# Altium PCB Control_Board_Model_C_Rigid_Flex.PcbDoc (part 1 of 8)
Units mm, origin at the board's own origin, x right, y up, seen from the top; angles counter-clockwise.
Board outline 86.8 x 53.6 mm, 6 copper layers (1-GND, 2-Sig, 3-Pwr, 4-GND, 5-Sig, 6-GND), stack 0.998 mm thick; 418 components, 342 nets, 1601 pads, 45 vias.
Unrouted connection lines stored in the file: 25.
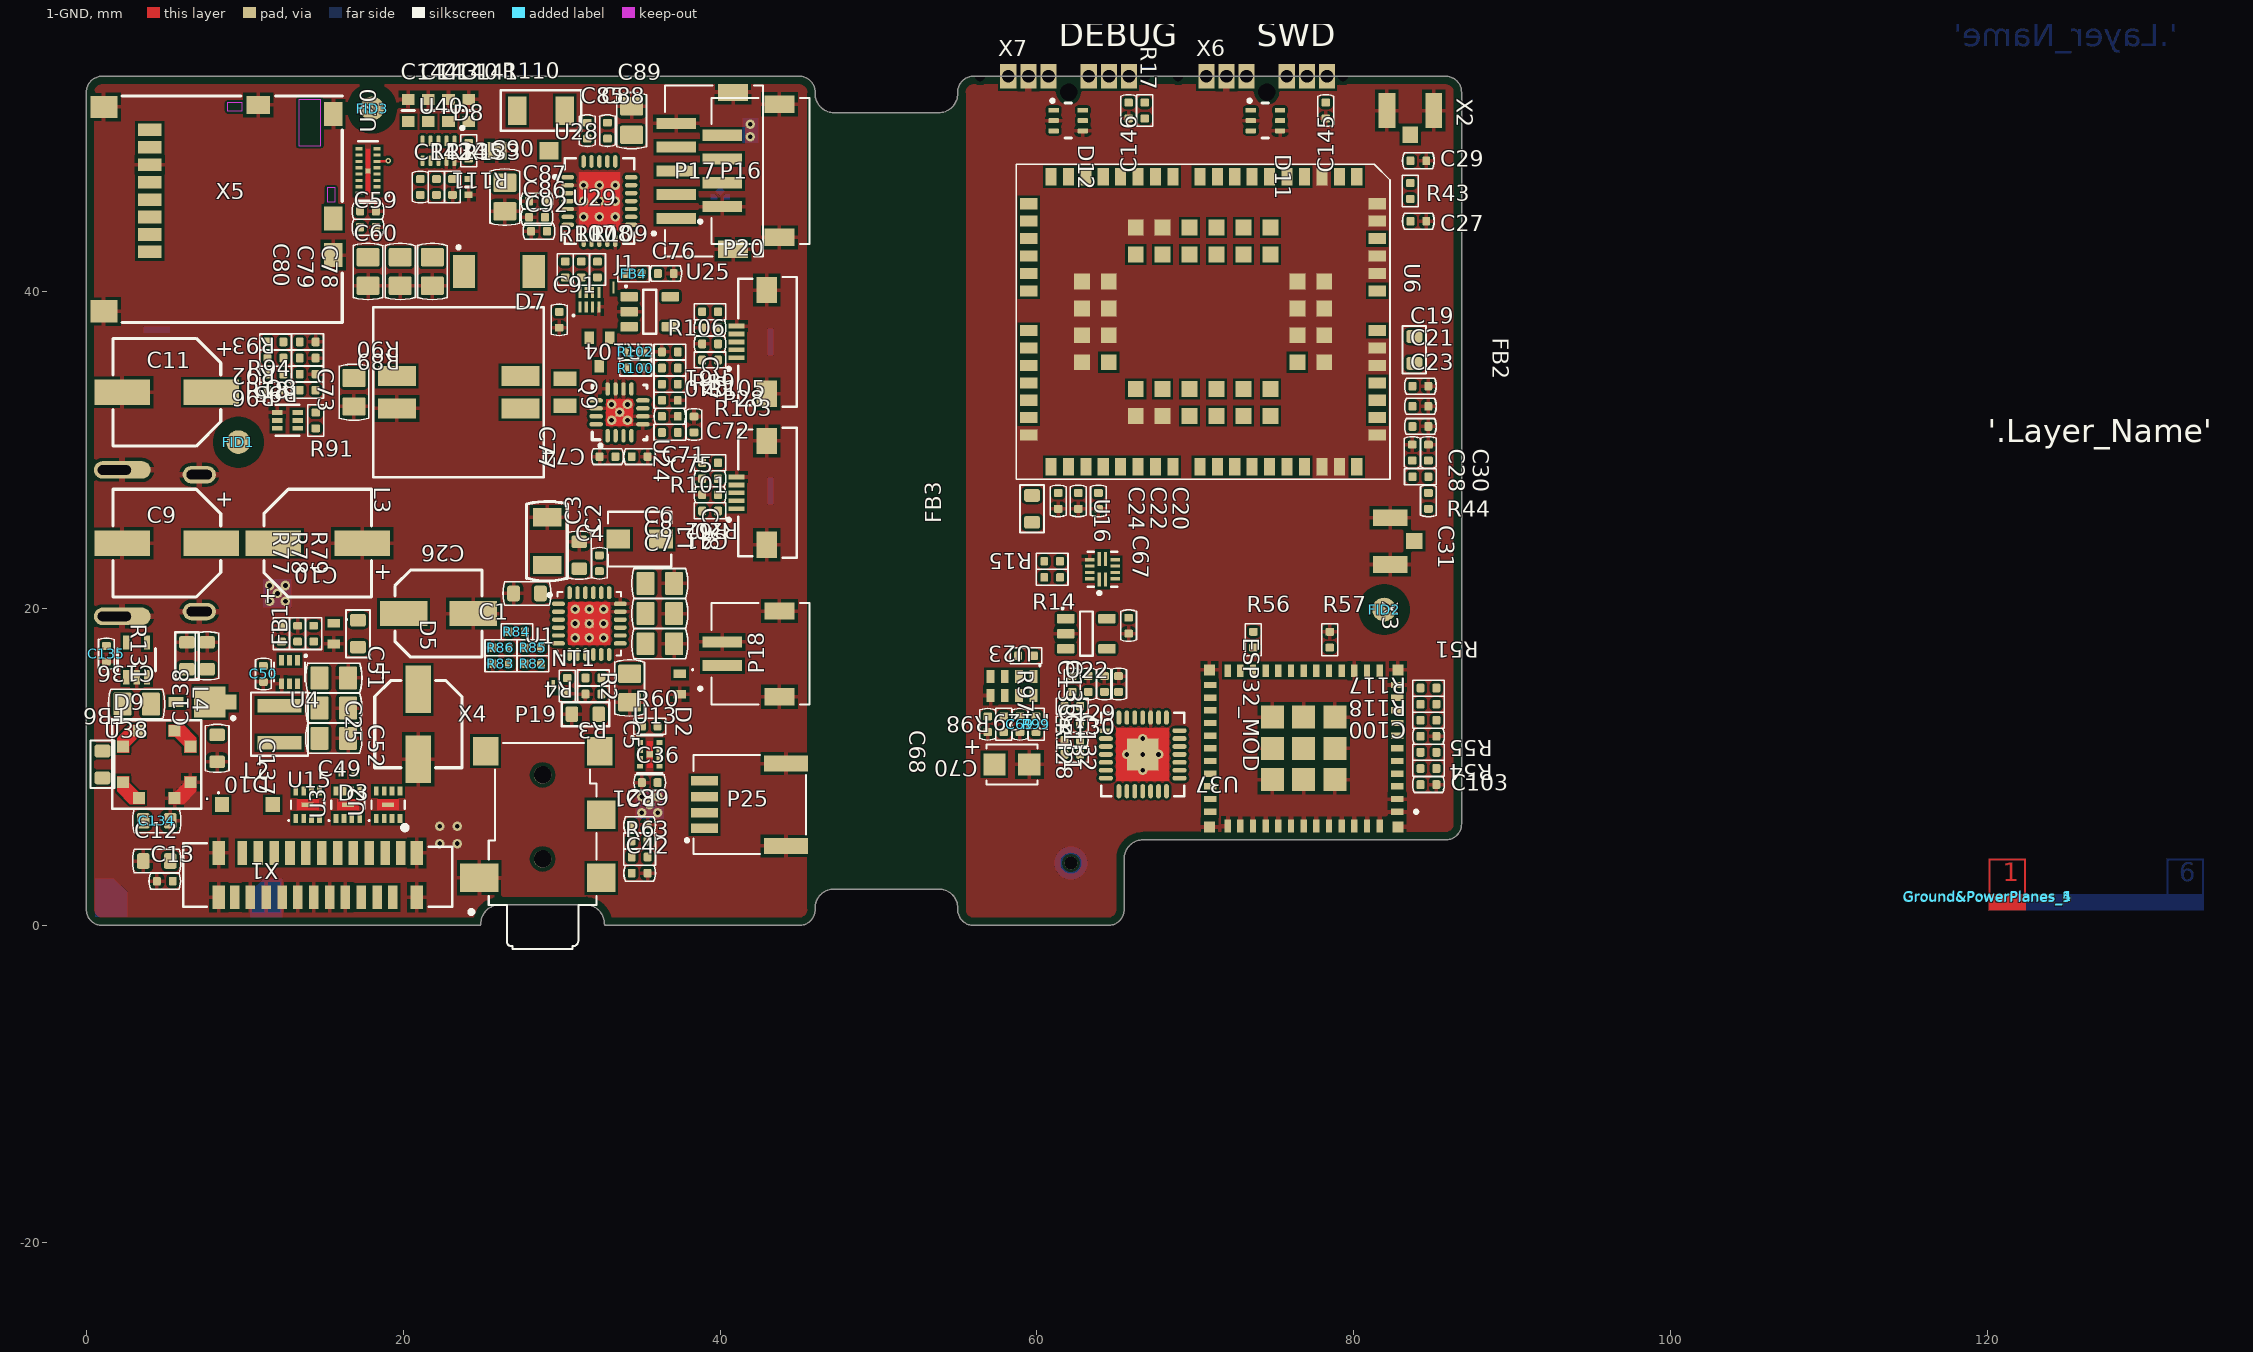
[diagram p0: 1-GND view]
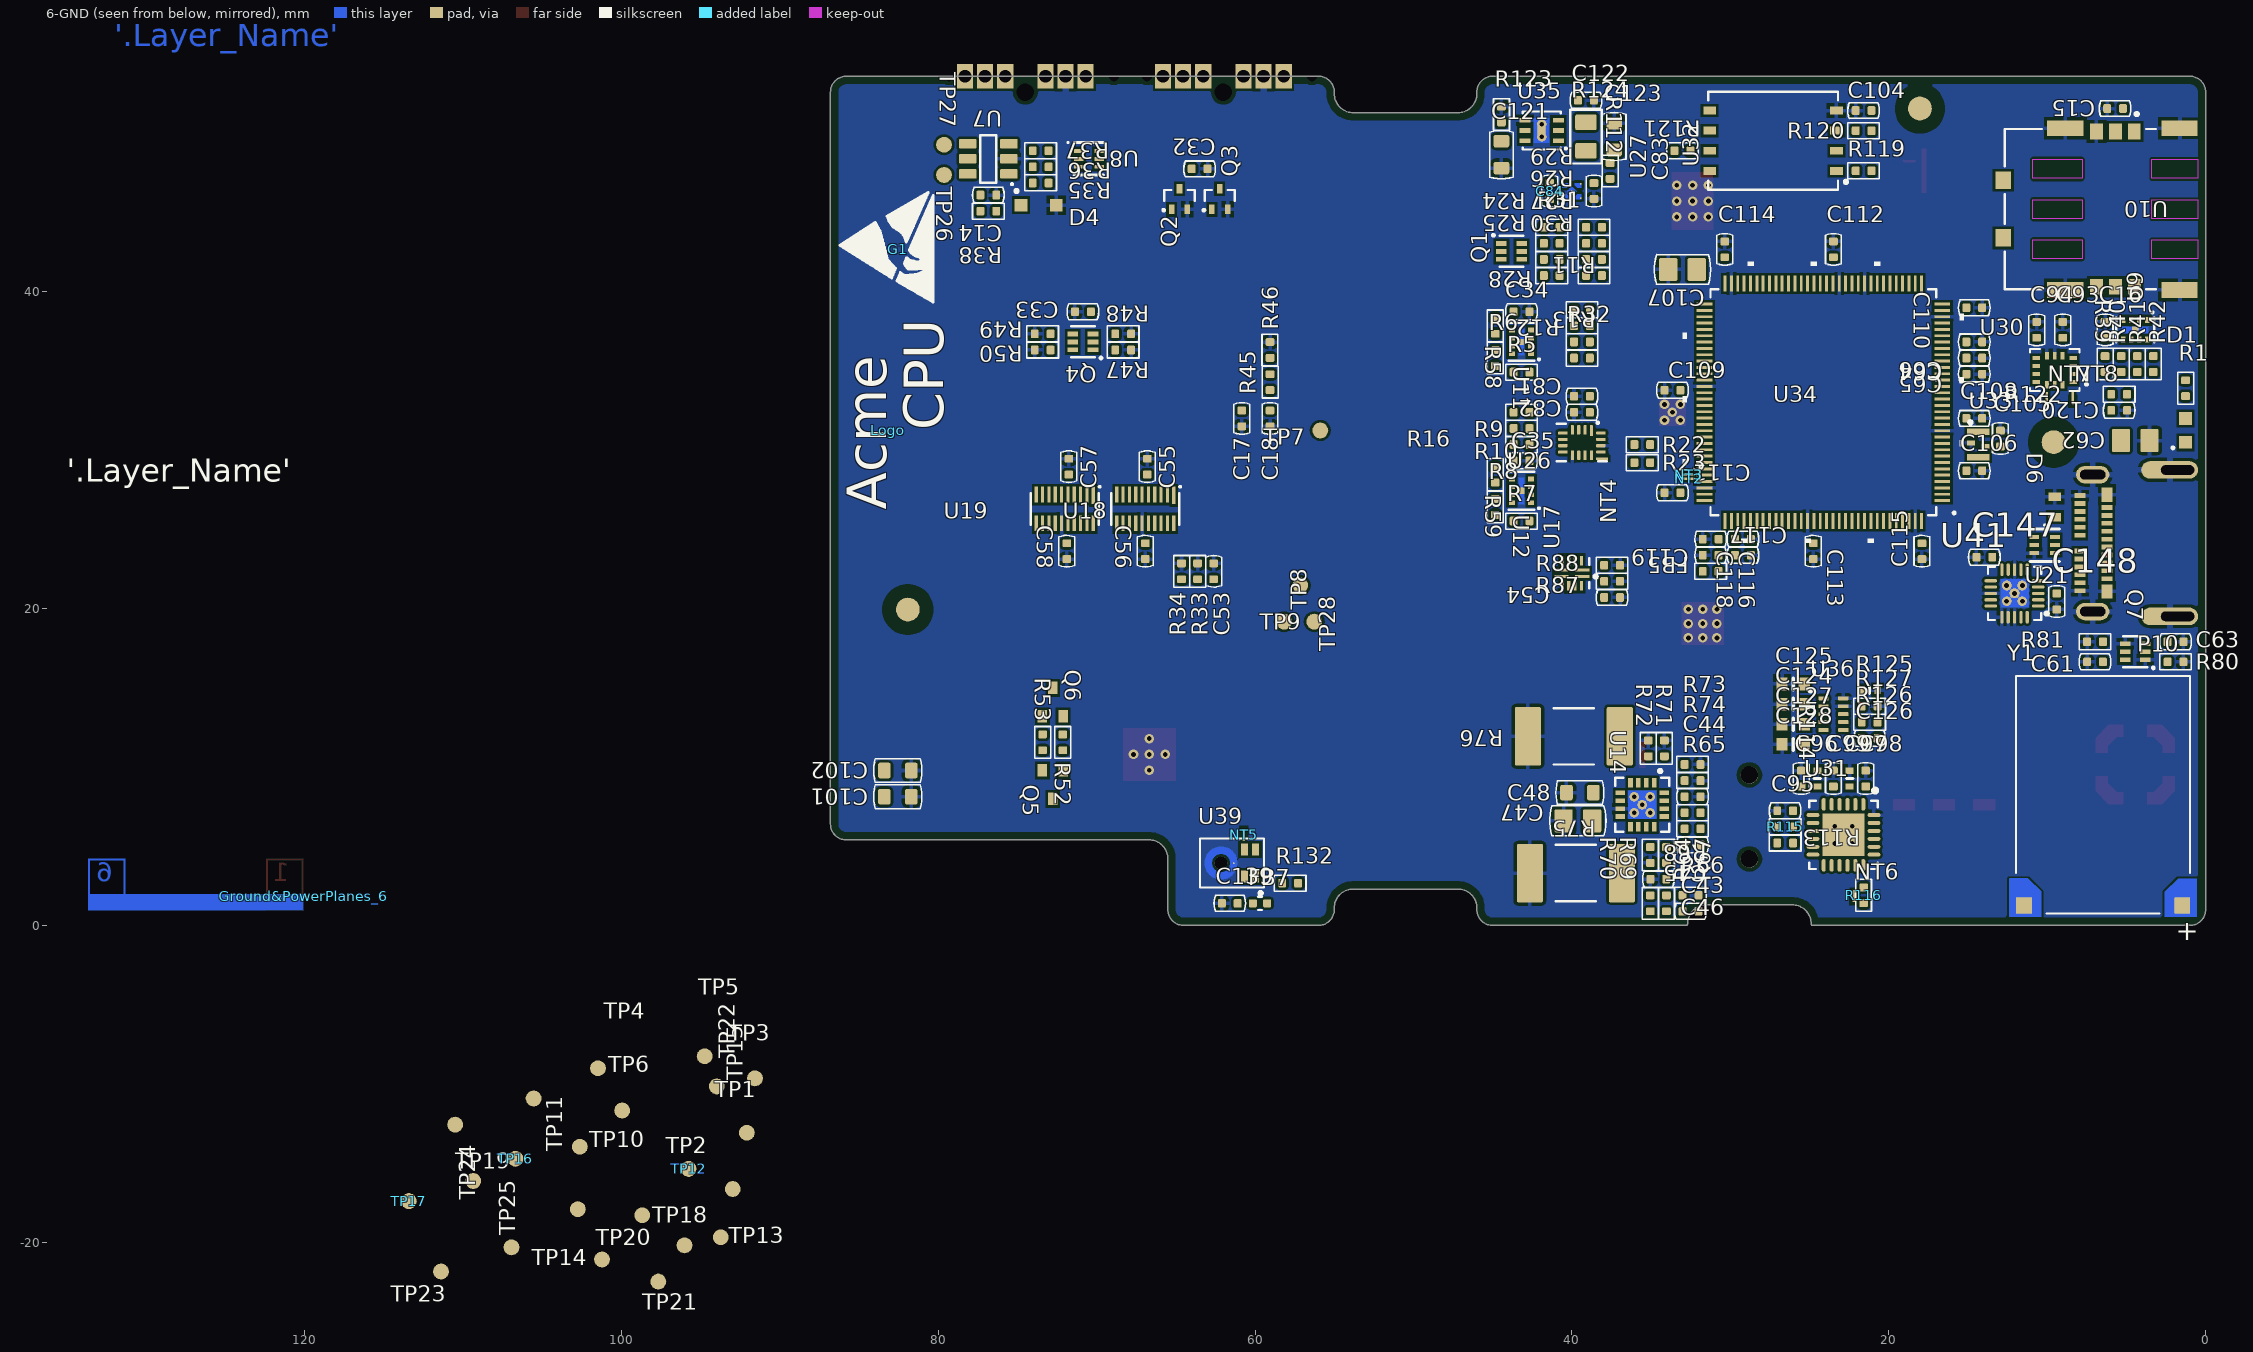
[diagram p1: 6-GND view, seen from below]
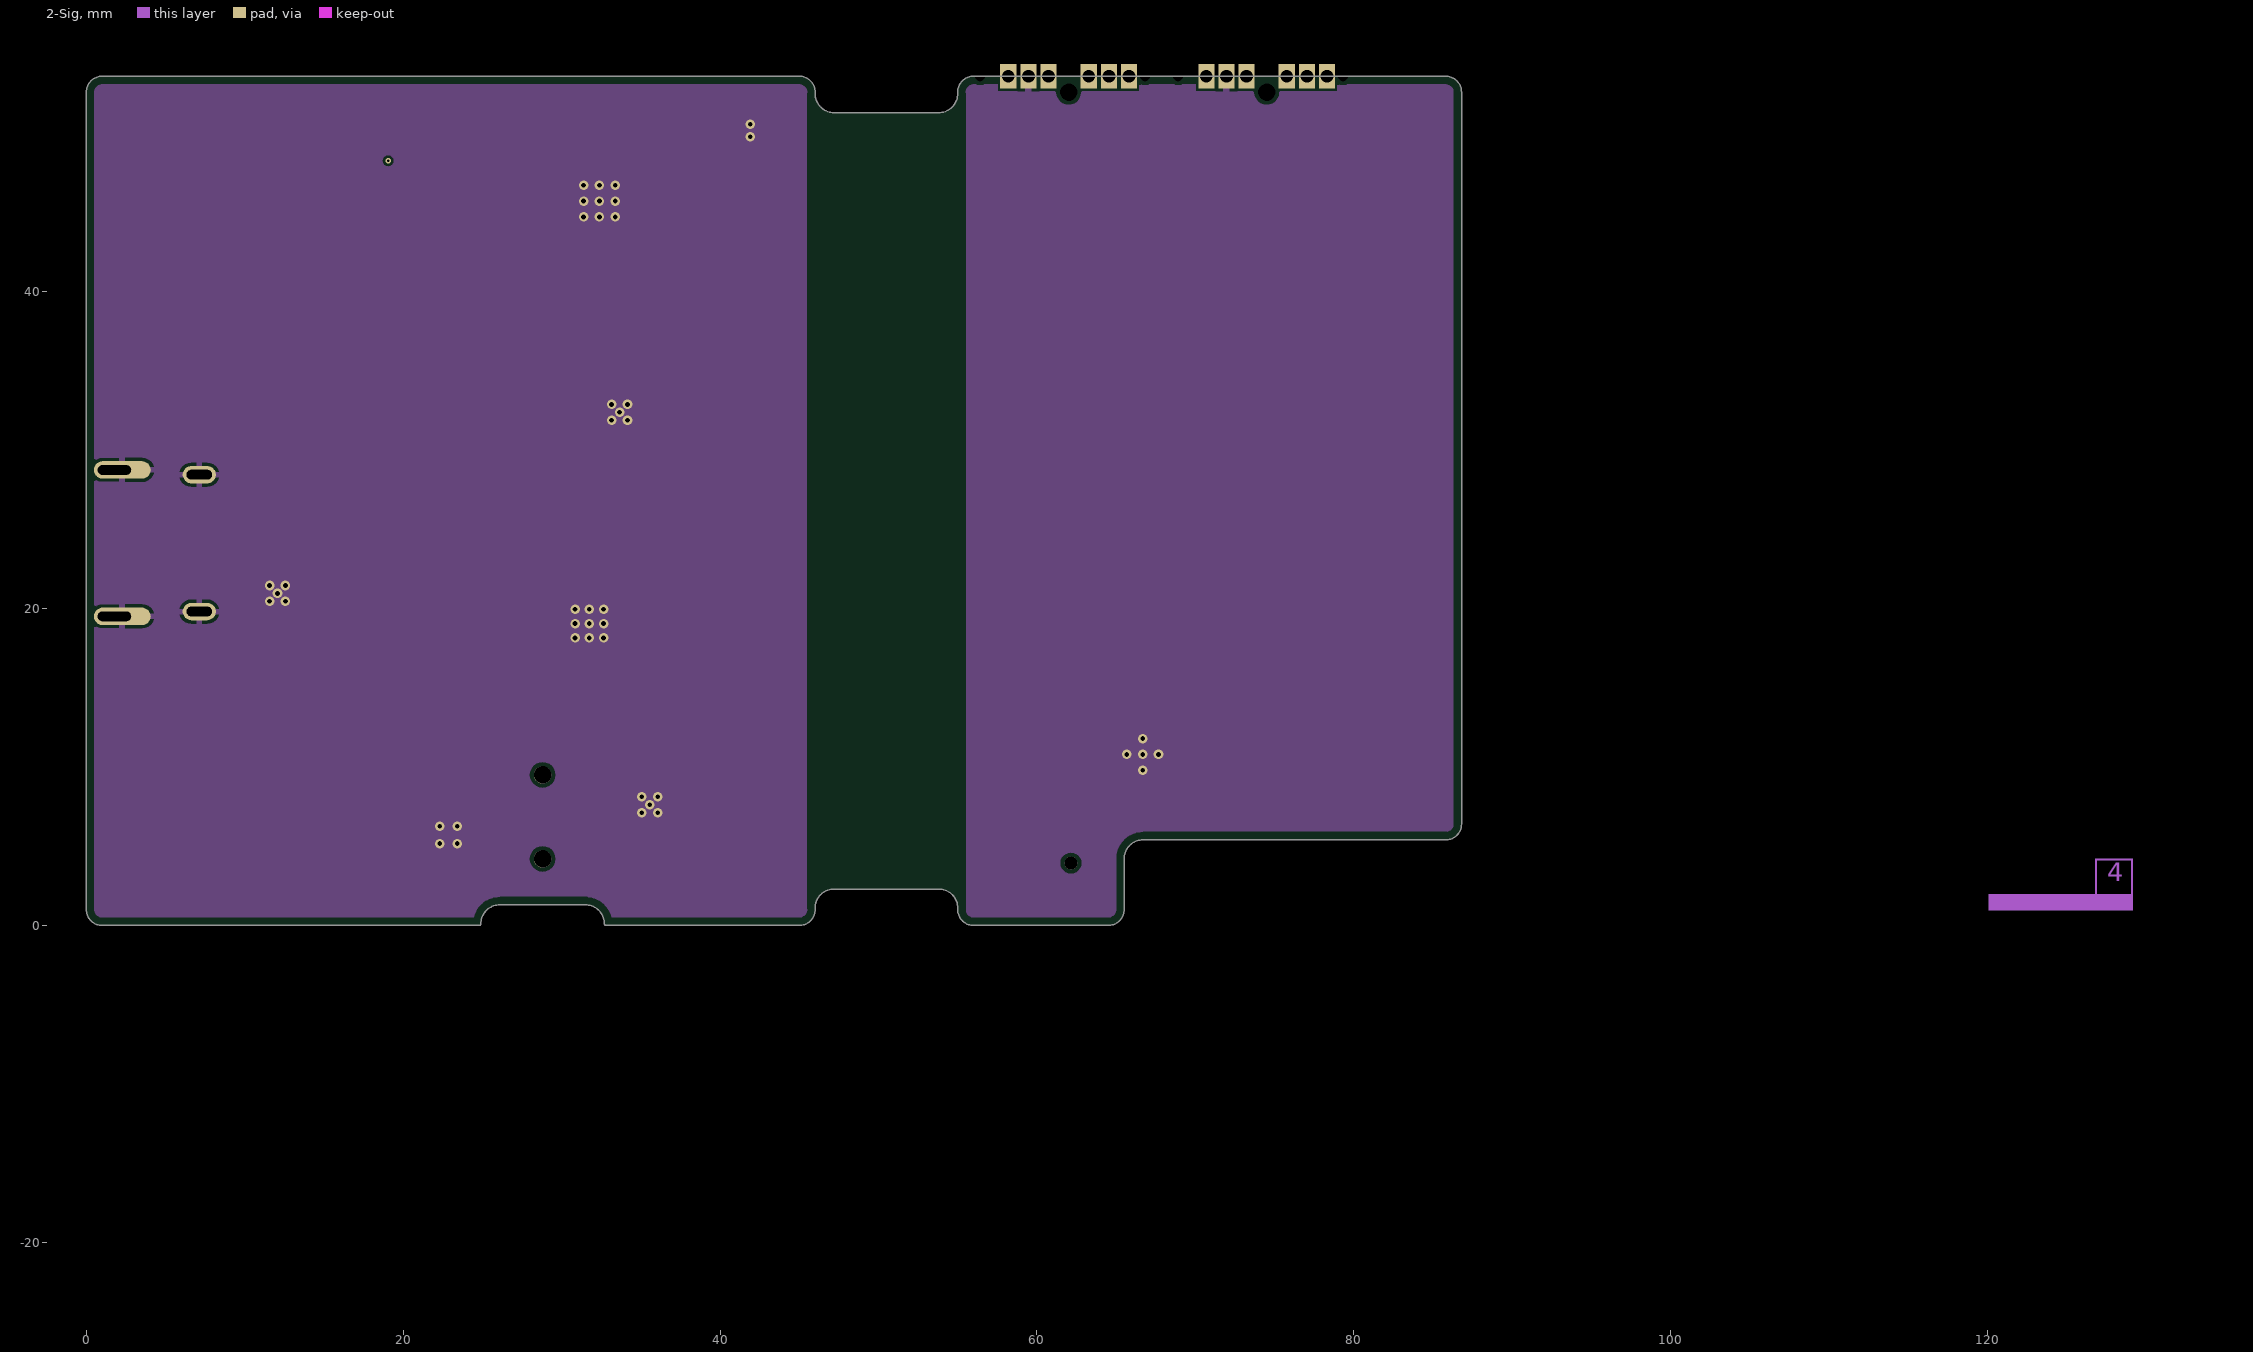
[diagram p2: 2-Sig]
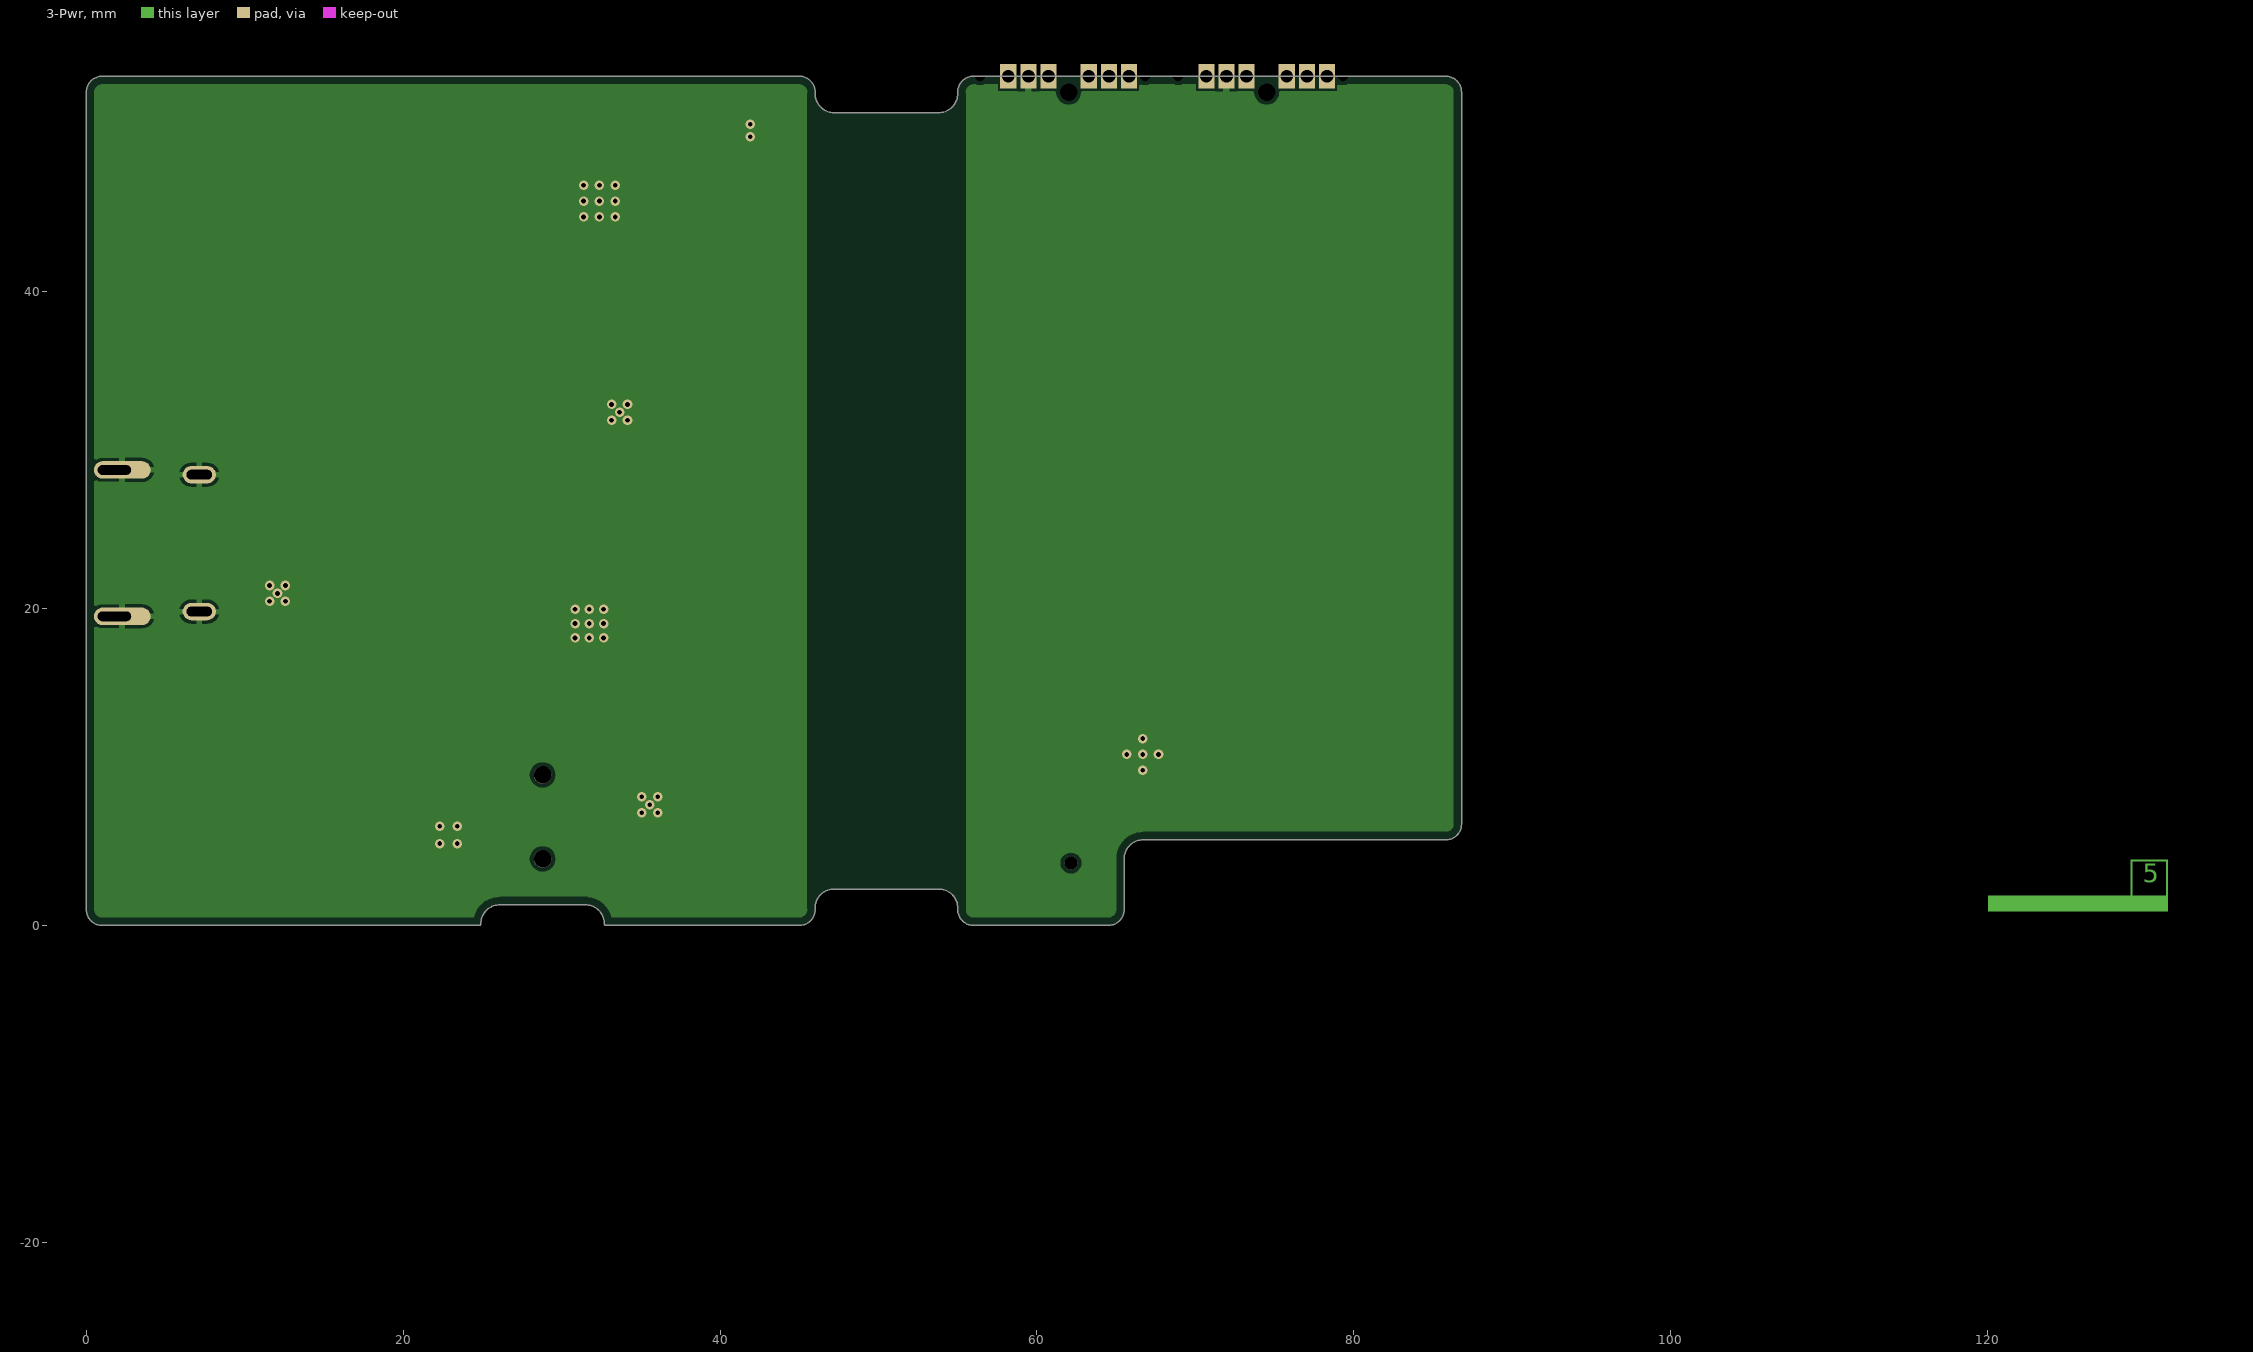
[diagram p3: 3-Pwr]
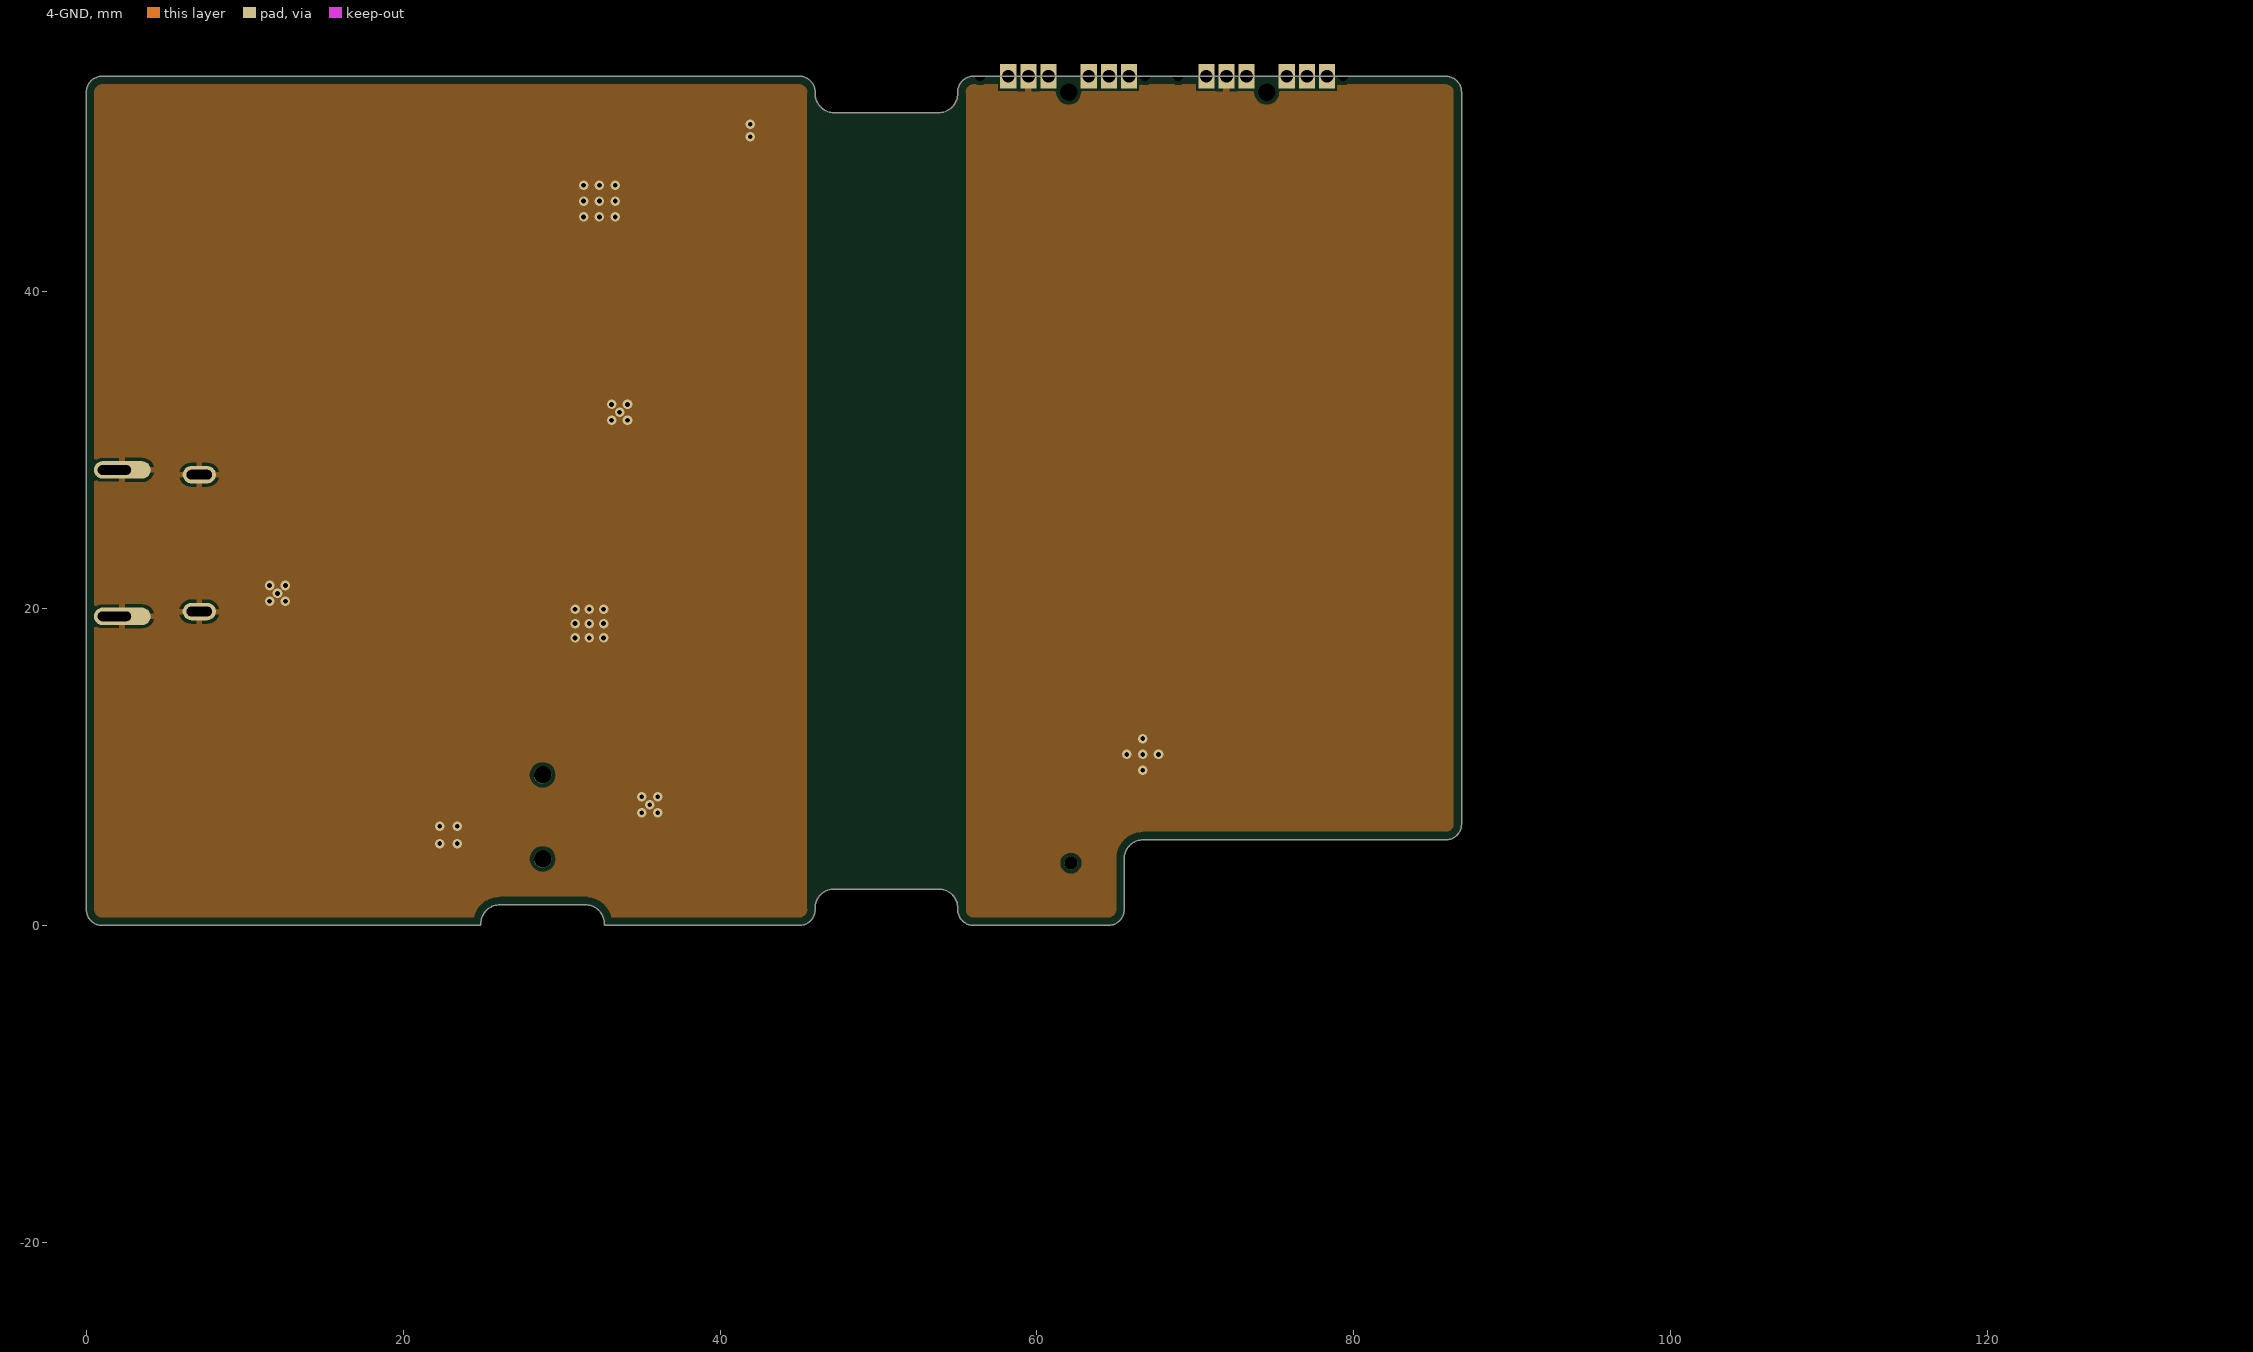
[diagram p4: 4-GND]
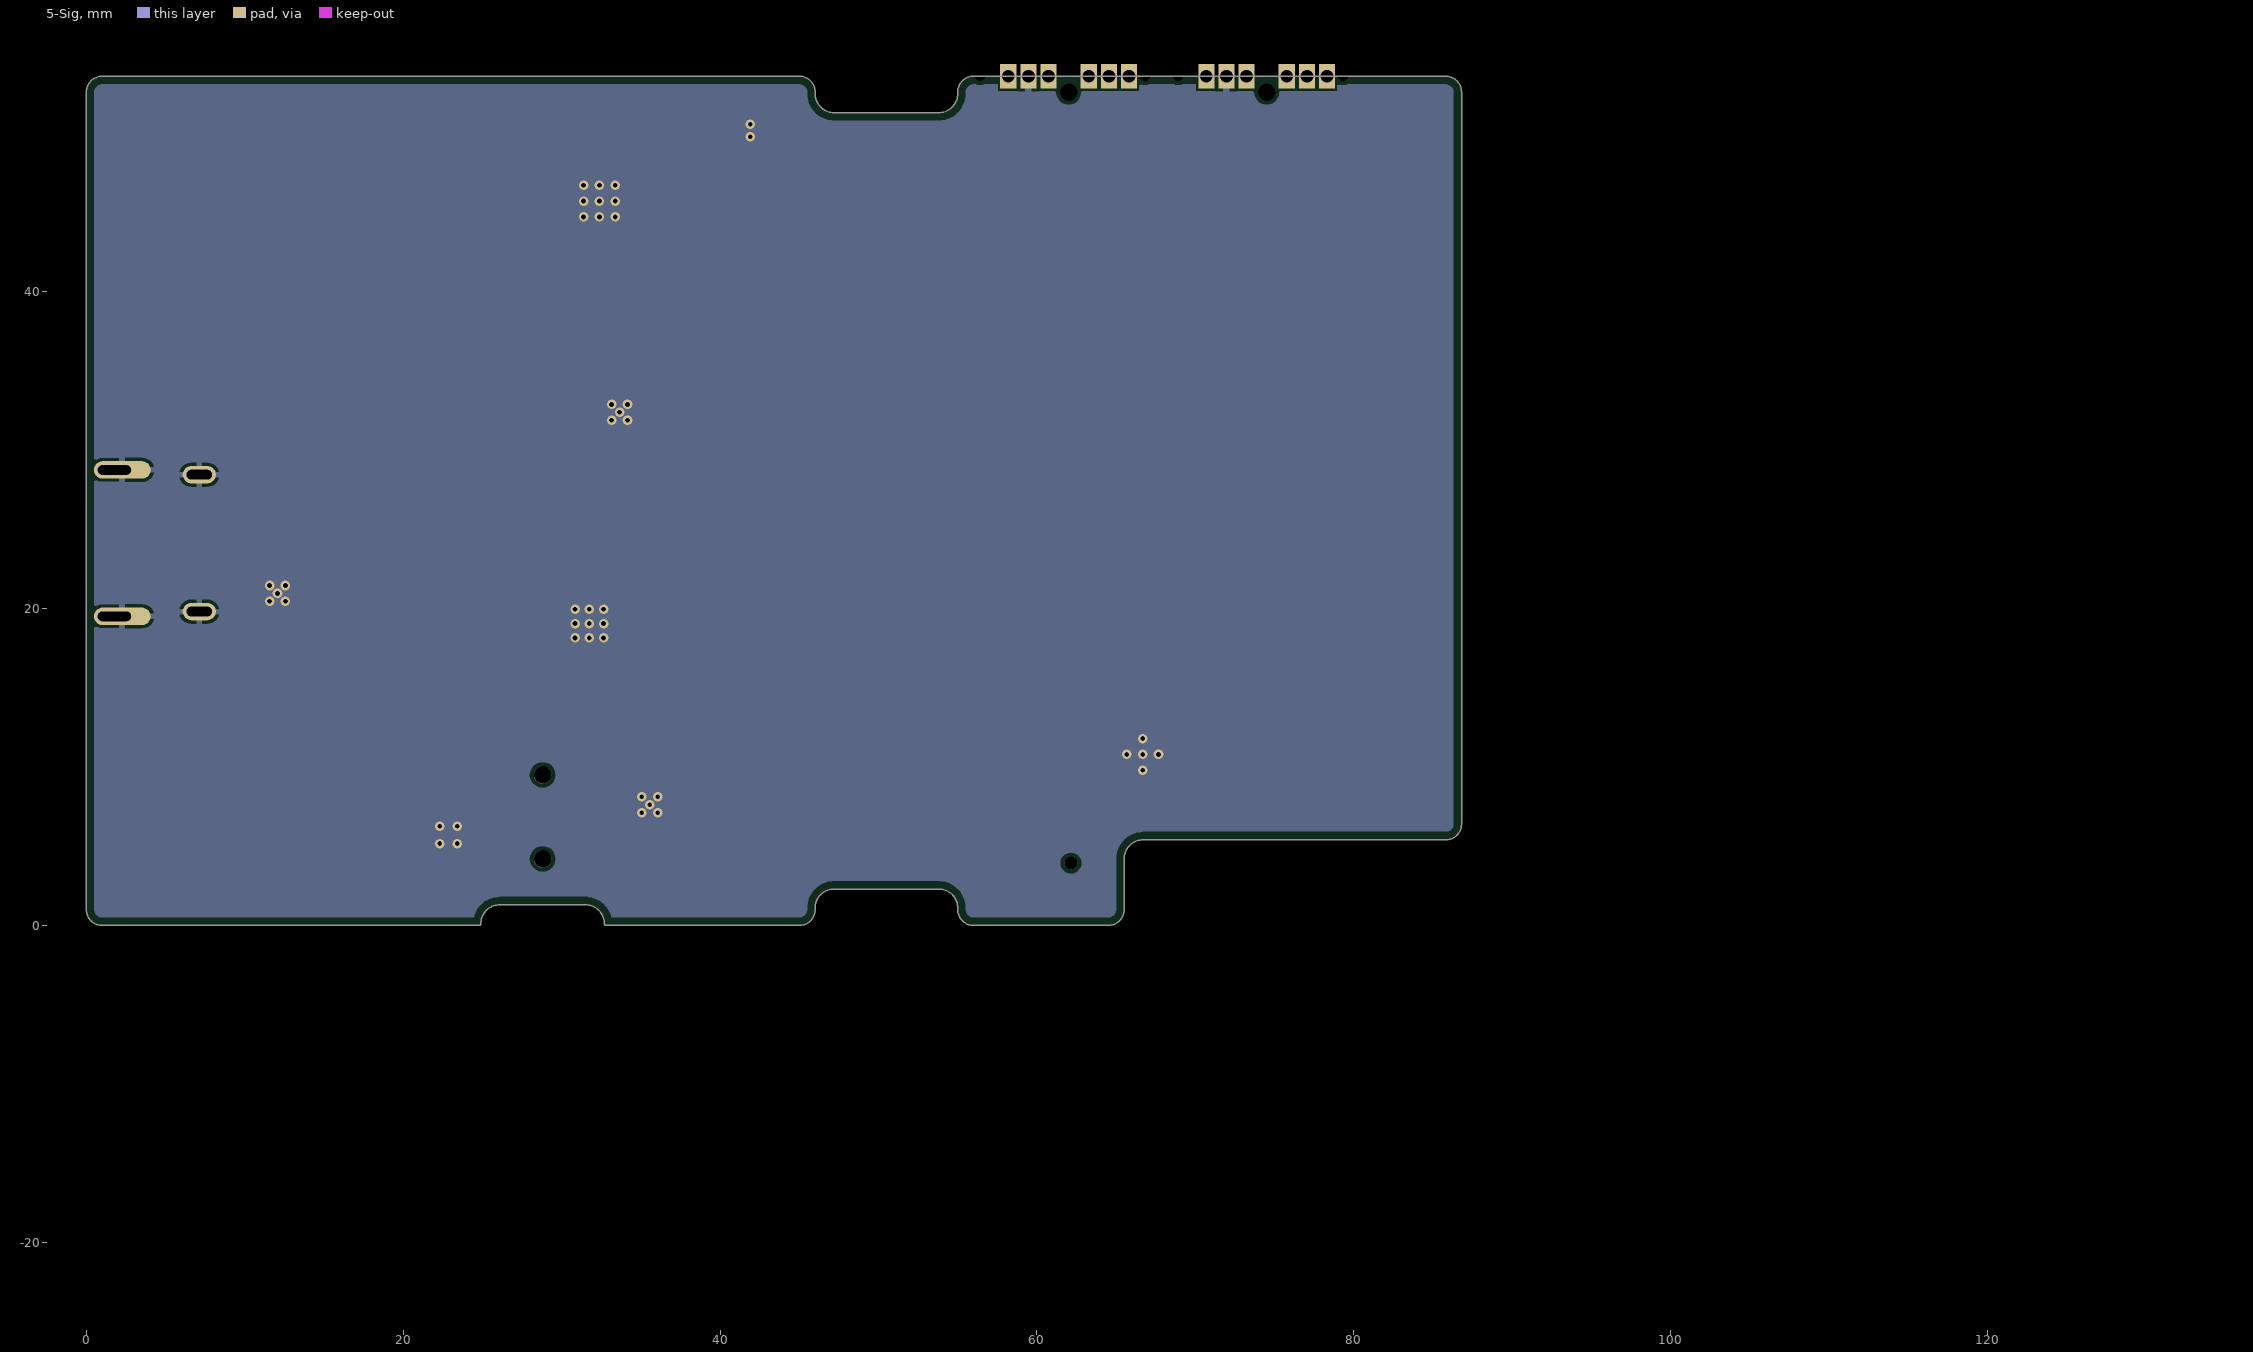
[diagram p5: 5-Sig]

## Layer stack, top to bottom
Coverlay Top: solder mask 0.04, WE-SMFlex-0002, Dk 4.3
Coverlay Top: solder mask 0.015, WE-SM-0001, Dk 3.5
Coverlay Top: solder mask 0.04, WE-CL-0007, Dk 3.6
1-GND: signal copper 0.045
Dielectric 1: prepreg 0.065, WE-PP-0034, Dk 3.5
2-Sig: signal copper 0.017
Core 1: core 0.25, WE-CO-0045, Dk 4.3
3-Pwr: signal copper 0.017
Dielectric 2: prepreg 0.125, WE-PP-0035, Dk 3.7
4-GND: signal copper 0.017
Core 2: core 0.25, WE-CO-0045, Dk 4.3
Dielectric 3: prepreg 0.1, WE-PP-0033, Dk 4.4
5-Sig: signal copper 0.017
Polyimide: core 0.05, WE-PI-0103, Dk 3.4
6-GND: signal copper 0.045
flexible Soldermask Bottom: solder mask 0.04, WE-CL-0007, Dk 3.6
flexible Soldermask Bottom: solder mask 0.015, WE-SM-0001, Dk 3.5
flexible Soldermask Bottom: solder mask 0.04, WE-SMFlex-0002, Dk 4.3

## Board outline
1,0 cw(c1,1) 0,1 0,52.6 cw(c1,52.6) 1,53.6 45,53.6 cw(c45,52.6) 46,52.6 46,52.5 ccw(c47.2,52.5) 47.2,51.3 53.8,51.3 ccw(c53.8,52.5) 55,52.5 55,52.6 cw(c56,52.6) 56,53.6 85.8,53.6 cw(c85.8,52.6) 86.8,52.6 86.8,6.4 cw(c85.8,6.4) 85.8,5.4 66.7,5.4 ccw(c66.7,4.2) 65.5,4.2 65.5,1 cw(c64.5,1) 64.5,0 56,0 cw(c56,1) 55,1 55,1.1 ccw(c53.8,1.1) 53.8,2.3 47.2,2.3 ccw(c47.2,1.1) 46,1.1 46,1 cw(c45,1) 45,0 32.8,0 cw(c32.8,0.1) 32.7,0.1 ccw(c31.5,0.1) 31.5,1.3 26.1,1.3 ccw(c26.1,0.1) 24.9,0.1 cw(c24.8,0.1) 24.8,0
board region "Layer Stack Region 2": 55.002,0.893 55,0.901 55,1 55,1.1 54.994,1.218 54.948,1.448 54.858,1.666 54.728,1.861 54.561,2.027 54.366,2.158 54.149,2.248 53.918,2.294 53.8,2.3 47.2,2.3 47.082,2.294 46.852,2.248 46.634,2.158 46.439,2.028 46.272,1.861 46.142,1.666 46.052,1.448 46.006,1.218 46,1.1 46,52.5 46.006,52.382 46.052,52.152 46.142,51.934 46.272,51.739 46.439,51.572 46.634,51.442 46.852,51.352 47.082,51.306 47.2,51.3 53.8,51.3 53.918,51.306 54.148,51.352 54.366,51.442 54.561,51.572 54.728,51.739 54.858,51.934 54.948,52.152 54.994,52.382 55,52.5
board region "Layer Stack Region 3": 55,52.519 55,52.6 55,52.698 55.038,52.892 55.114,53.074 55.223,53.237 55.363,53.377 55.526,53.486 55.708,53.562 55.901,53.6 56,53.6 85.8,53.6 85.898,53.6 86.092,53.562 86.274,53.486 86.437,53.377 86.577,53.237 86.686,53.074 86.762,52.892 86.8,52.698 86.8,52.6 86.8,6.4 86.8,6.302 86.762,6.108 86.686,5.926 86.577,5.763 86.437,5.623 86.274,5.514 86.092,5.438 85.898,5.4 85.8,5.4 66.7,5.4 66.582,5.394 66.352,5.348 66.134,5.258 65.939,5.128 65.772,4.961 65.642,4.766 65.552,4.548 65.506,4.318 65.5,4.2 65.5,1 65.5,0.902 65.462,0.708 65.386,0.526 65.277,0.363 65.137,0.223 64.974,0.114 64.792,0.038 64.598,0 64.5,0 56,0 55.901,0 55.708,0.038 55.526,0.114 55.362,0.223 55.223,0.362 55.114,0.526 55.038,0.708 55.002,0.893
board region "Layer Stack Region 1": 46,1.083 46,1 46,0.901 45.962,0.708 45.886,0.526 45.777,0.362 45.638,0.223 45.474,0.114 45.292,0.038 45.098,0 45,0 32.8,0 32.78,0 32.743,0.015 32.715,0.043 32.7,0.08 32.7,0.1 32.694,0.218 32.648,0.448 32.558,0.666 32.428,0.861 32.261,1.028 32.066,1.158 31.848,1.248 31.618,1.294 31.5,1.3 26.1,1.3 25.982,1.294 25.752,1.248 25.534,1.158 25.339,1.028 25.172,0.861 25.042,0.666 24.952,0.448 24.906,0.218 24.9,0.1 24.9,0.08 24.885,0.043 24.857,0.015 24.82,0 24.8,0 1,0 0.902,0 0.708,0.038 0.526,0.114 0.363,0.223 0.223,0.363 0.114,0.526 0.038,0.708 0,0.902 0,1 0,52.6 0,52.698 0.038,52.892 0.114,53.074 0.223,53.237 0.363,53.377 0.526,53.486 0.708,53.562 0.902,53.6 1,53.6 45,53.6 45.098,53.6 45.292,53.561 45.474,53.486 45.637,53.377 45.777,53.237 45.886,53.073 45.961,52.891 46,52.698 46,52.6 46,52.517

## Design rules (kind name [scope] priority, off if disabled: settings)
BoardOutlineClearance BoardOutlineClearance_LayerStack [WithinRoom('PCB_Stackup')] p1: gap=0 ignorepadtopadclearanceinfootprint=FALSE
BoardOutlineClearance BoardOutlineClearance_LayerNames [WithinRoom('Layer_Names')] p2: gap=0 ignorepadtopadclearanceinfootprint=FALSE
BoardOutlineClearance BoardOutlineClearance_uSD_Slot [HasFootprintPad('5025700893','0')] p3: gap=0 ignorepadtopadclearanceinfootprint=FALSE
BoardOutlineClearance BoardOutlineClearance_USB-C_Conn [HasFootprintPad('MOLEX_2012670005','S3') or HasFootprintPad('MOLEX_2012670005','S4')] p4: gap=0 ignorepadtopadclearanceinfootprint=FALSE
BoardOutlineClearance BoardOutlineClearance_nanoSIM_Slot [HasFootprintPad('1042240820_MOL','G4') or HasFootprintPad('1042240820_MOL','G1') or ((ObjectKind = 'Fill') and HasFootprint('1042240820_MOL'))] p5: gap=0 ignorepadtopadclearanceinfootprint=FALSE
BoardOutlineClearance BoardOutlineClearance_Overlays [OnBottomSilkscreen or OnTopSilkscreen] p6: gap=0 ignorepadtopadclearanceinfootprint=FALSE
BoardOutlineClearance BoardFlexRigid [All] p7: gap=0.5 ignorepadtopadclearanceinfootprint=FALSE
BoardOutlineClearance [All] p8: gap=0.5 ignorepadtopadclearanceinfootprint=FALSE
Clearance Clearance_InnerLayers [not OnTopLayer and not OnBottomLayer] p1: gap=0.152 ignorepadtopadclearanceinfootprint=TRUE except(0.25: Arc-Hole Track-Hole SMDPad-Hole THPad-Hole Via-Hole Fill-Hole Poly-Hole Region-Hole Text-Hole)
Clearance [All] p2: gap=0.152 ignorepadtopadclearanceinfootprint=FALSE
ComponentClearance ComponentClearance_NetTie [HasFootprint('Net Tie 6x30mil')] p1: gap=0 collisioncheckmode=3 verticalgap=0 showdistances=FALSE
ComponentClearance ComponentClearance_PCB_Stackup [WithinRoom('PCB_Stackup')] p2: gap=0 collisioncheckmode=3 verticalgap=0 showdistances=FALSE
ComponentClearance ComponentClearance_Motor_Connectors [HasFootprint('CONN_JST_S5B-ZR-SM4A-TF(LF)(SN)') vs HasFootprint('CONN_JST_S4B-ZR-SM4A-TF(LF)(SN)')] p3: gap=0 collisioncheckmode=3 verticalgap=0 showdistances=FALSE
ComponentClearance [All] p4: gap=0.305 collisioncheckmode=3 verticalgap=1.016 showdistances=FALSE
DiffPairsRouting [All] p1: maxlimit=0.152 minlimit=0.152 mostfreqgap=0.152 toplayer_minwidth=0.152 toplayer_maxwidth=0.152 toplayer_prefwidth=0.152 midlayer1_minwidth=0.152 midlayer1_maxwidth=0.152 midlayer1_prefwidth=0.152 midlayer2_minwidth=0.152 midlayer2_maxwidth=0.152 midlayer2_prefwidth=0.152 midlayer3_minwidth=0.152 midlayer3_maxwidth=0.152 midlayer3_prefwidth=0.152 midlayer4_minwidth=0.152 midlayer4_maxwidth=0.152 midlayer4_prefwidth=0.152 bottomlayer_minwidth=0.152 bottomlayer_maxwidth=0.152 bottomlayer_prefwidth=0.152 maxuncoupledlength=12.7
HoleSize [All] p1: absolutevalues=TRUE maxlimit=6.3 minlimit=0.15 maxpercent=80.000 minpercent=20.000
HoleToHoleClearance [All] p1: gap=0.254 allowstackedmicrovias=FALSE
MatchedLengths MatchedLengths_QSPI [InNetClass('QSPI')] p1: tolerance=1.27 checknetsindiffpair=FALSE checkdiffpairvsdiffpair=TRUE checkxsignals=TRUE checkothers=TRUE
MinimumAnnularRing MinimumAnnularRing_Via_Int [IsVia and not (OnTopLayer or OnBottomLayer)] p1: minimumring=0
MinimumAnnularRing [All] p2: minimumring=0.152
MinimumSolderMaskSliver [All] p1: minsoldermaskwidth=0.076
PlaneClearance [All] p1: clearance=0.25
PlaneConnect PlaneConnect_Via [IsVia] p1: planeconnectstyle=Direct reliefexpansion=0.508 reliefentries=4 reliefconductorwidth=0.254 reliefairgap=0.254
PlaneConnect PlaneConnect_HeatTrap [All] p2: pad.planeconnectstyle=Relief pad.reliefexpansion=0.152 pad.reliefentries=4 pad.reliefconductorwidth=0.152 pad.reliefairgap=0.152 via.planeconnectstyle=Direct via.reliefexpansion=0.203 via.reliefentries=4 via.reliefconductorwidth=0.254 via.reliefairgap=0.254
PolygonConnect PolygonConnect_Via [IsVia] p1: connectstyle=Direct reliefconductorwidth=0.254 reliefentries=4 polygonreliefangle="90 Angle" airgapwidth=0.254
PolygonConnect PolygonConnect_TestPoints [InComponentClass('TestPoint')] p2: connectstyle=Direct reliefconductorwidth=0.254 reliefentries=4 polygonreliefangle="90 Angle" airgapwidth=0.254
PolygonConnect PolygonConnect_ThermPads [HasFootprintPad('DFN65P100X40-4N','5')] p3: connectstyle=Direct reliefconductorwidth=0.254 reliefentries=4 polygonreliefangle="90 Angle" airgapwidth=0.254
PolygonConnect PolygonConnect_BG95_GND [HasFootprint('BG95') and (InNet('GND') or InNetClass('BG95_PWR'))] p4: connectstyle=Direct reliefconductorwidth=0.254 reliefentries=4 polygonreliefangle="90 Angle" airgapwidth=0.254
PolygonConnect [All] p5: thpad.connectstyle=Relief thpad.reliefconductorwidth=0.381 thpad.reliefentries=4 thpad.polygonreliefangle="90 Angle" thpad.airgapwidth=0.203 smdpad.connectstyle=Relief smdpad.reliefconductorwidth=0.254 smdpad.reliefentries=4 smdpad.polygonreliefangle="90 Angle" smdpad.airgapwidth=0.203 via.connectstyle=Direct via.reliefconductorwidth=0.254 via.reliefentries=4 via.polygonreliefangle="90 Angle" via.airgapwidth=0.254
RoomDefinition MIC1 [InComponentClass('MIC1')] p1: confinementstyle=ConfineIn formatcopy=TRUE lockcomponents=FALSE outline 56.515,0.635 64.135,0.635 64.135,6.35 56.515,6.35
RoomDefinition PCB_Stackup [False] p2: confinementstyle=ConfineIn formatcopy=TRUE lockcomponents=FALSE outline 119.38,4.956 134.747,4.956 134.747,0.257 119.38,0.257
RoomDefinition +1V8_PS [InComponentClass('+1V8_PS')] p3: confinementstyle=ConfineIn formatcopy=TRUE lockcomponents=FALSE outline 41.91,45.085 36.83,45.085 36.83,47.625 41.91,47.625
RoomDefinition P26 [InComponentClass('P26')] p4: confinementstyle=ConfineIn formatcopy=TRUE lockcomponents=FALSE outline 60.325,17.78 56.515,17.78 56.515,8.255 60.325,8.255
RoomDefinition +3V3_PS [InComponentClass('+3V3_PS')] p5: confinementstyle=ConfineIn formatcopy=TRUE lockcomponents=FALSE outline 24.765,45.593 24.765,52.578 19.685,52.578 19.685,45.593
RoomDefinition +3V3_AUDIO_PS [InComponentClass('+3V3_AUDIO_PS')] p6: confinementstyle=ConfineIn formatcopy=TRUE lockcomponents=FALSE outline 20.32,15.875 27.305,15.875 27.305,10.795 20.32,10.795
RoomDefinition +1V8_VLT1 [InComponentClass('+1V8_VLT1')] p7: confinementstyle=ConfineIn formatcopy=TRUE lockcomponents=FALSE outline 74.295,22.674 69.723,22.674 69.723,30.04 74.295,30.04
RoomDefinition +1V8_VLT2 [InComponentClass('+1V8_VLT2')] p8: confinementstyle=ConfineIn formatcopy=TRUE lockcomponents=FALSE outline 69.342,22.674 64.77,22.674 64.77,30.04 69.342,30.04
RoomDefinition "U_TPS22810 2" [InComponentClass('U_TPS22810 2')] p9: confinementstyle=ConfineIn formatcopy=TRUE lockcomponents=FALSE outline 36.83,52.705 45.72,52.705 45.72,46.982 36.83,46.982
RoomDefinition RTC_XTAL [InComponentClass('RTC_XTAL')] p10: confinementstyle=ConfineIn formatcopy=TRUE lockcomponents=FALSE outline 12.446,29.024 15.621,29.024 15.621,32.199 12.446,32.199
RoomDefinition CODEC [InComponentClass('CODEC')] p11: confinementstyle=ConfineIn formatcopy=TRUE lockcomponents=FALSE outline 20.32,10.16 27.305,10.16 27.305,2.54 20.32,2.54
RoomDefinition P128 [InComponentClass('P128')] p12: confinementstyle=ConfineIn formatcopy=TRUE lockcomponents=FALSE outline 7.62,32.58 7.62,38.93 11.43,38.93 11.43,32.58
RoomDefinition P01 [InComponentClass('P01')] p13: confinementstyle=ConfineIn formatcopy=TRUE lockcomponents=FALSE outline 68,48.895 80.5,48.895 80.5,53.975 68,53.975
RoomDefinition STM32G473QETx [InComponentClass('STM32G473QETx')] p14: confinementstyle=ConfineIn formatcopy=TRUE lockcomponents=FALSE outline 36.83,20.32 12.827,20.32 12.827,43.815 36.83,43.815
RoomDefinition "U_DRV10975 3-ph Sensorless BLDC Motor Driver" [InComponentClass('U_DRV10975 3-ph Sensorless BLDC Motor Driver')] p15: confinementstyle=ConfineIn formatcopy=TRUE lockcomponents=FALSE outline 35.433,53.213 25.273,53.213 25.273,41.783 35.433,41.783
RoomDefinition P02 [InComponentClass('P02')] p16: confinementstyle=ConfineIn formatcopy=TRUE lockcomponents=FALSE outline 55.5,48.895 68,48.895 68,53.975 55.5,53.975
RoomDefinition USB-to-UART_Bridge [InComponentClass('USB-to-UART_Bridge')] p17: confinementstyle=ConfineIn formatcopy=TRUE lockcomponents=FALSE outline 69.85,16.51 60.96,16.51 60.96,7.62 69.85,7.62
RoomDefinition FLASH [InComponentClass('FLASH')] p18: confinementstyle=ConfineIn formatcopy=TRUE lockcomponents=FALSE outline 20.32,45.72 20.32,53.34 33.655,53.34 33.655,45.72
RoomDefinition P105 [InComponentClass('P105')] p19: confinementstyle=ConfineIn formatcopy=TRUE lockcomponents=FALSE outline 60.96,16.51 60.96,20.32 66.675,20.32 66.675,16.51
RoomDefinition DISP_PS [InComponentClass('DISP_PS')] p20: confinementstyle=ConfineIn formatcopy=TRUE lockcomponents=FALSE outline 10.16,19.05 0,19.05 0,5.715 10.16,5.715
RoomDefinition P110 [InComponentClass('P110')] p21: confinementstyle=ConfineIn formatcopy=TRUE lockcomponents=FALSE outline 44.45,14.605 44.45,0.635 31.115,0.635 31.115,14.605
RoomDefinition P103 [InComponentClass('P103')] p22: confinementstyle=ConfineIn formatcopy=TRUE lockcomponents=FALSE outline 16.51,41.783 16.51,27.178 38.735,27.178 38.735,41.783
RoomDefinition P109 [InComponentClass('P109')] p23: confinementstyle=ConfineIn formatcopy=TRUE lockcomponents=FALSE outline 58.42,53.34 58.42,20.955 86.36,20.955 86.36,53.34
RoomDefinition +4V2_PS [InComponentClass('+4V2_PS')] p24: confinementstyle=ConfineIn formatcopy=TRUE lockcomponents=FALSE outline 10.16,19.685 10.16,10.795 17.78,10.795 17.78,19.685
RoutingVias "PTH Via" [InDrillLayerPair('1-Top-GND - 6-Bot-GND')] p1: holewidth=0.2 width=0.55 viastyle="Through Hole" minholewidth=0.2 minwidth=0.55 maxholewidth=0.2 maxwidth=0.55
RoutingVias "Micro Via Bottom" [InDrillLayerPair('5-Sig - 6-Bot-GND')] p2: holewidth=0.15 width=0.3 viastyle="Through Hole" minholewidth=0.1 minwidth=0.3 maxholewidth=0.2 maxwidth=0.3
SilkToSilkClearance [All] p1: silktosilkclearance=0.025
SilkToSolderMaskClearance [IsPad] p1: minsilkscreentomaskgap=0.102 clearancetoexposedcopper=FALSE
SolderMaskExpansion [All] p1: expansion=0.051
Width "Schematic Width Constraint_4" [InNet('NetC31_2')] p1: maxlimit=1.133 minlimit=0.102 preferedwidth=0.254 toplayer_maxwidth=0.154 toplayer_prefwidth=0.126 midlayer1_minwidth=0.178 midlayer1_maxwidth=0.254 midlayer1_prefwidth=0.214 midlayer2_minwidth=0.628 midlayer2_maxwidth=0.869 midlayer2_prefwidth=0.74 midlayer3_minwidth=0.254 midlayer3_maxwidth=0.254 midlayer4_minwidth=0.254 midlayer4_maxwidth=0.254 bottomlayer_minwidth=0.822 bottomlayer_prefwidth=0.966 impedancedriven=TRUE minimp=45.000000 maximp=55.000000 favimp=50.000000
Width "Schematic Width Constraint_3" [InNet('NetC30_2')] p2: maxlimit=1.133 minlimit=0.102 preferedwidth=0.254 toplayer_maxwidth=0.154 toplayer_prefwidth=0.126 midlayer1_minwidth=0.178 midlayer1_maxwidth=0.254 midlayer1_prefwidth=0.214 midlayer2_minwidth=0.628 midlayer2_maxwidth=0.869 midlayer2_prefwidth=0.74 midlayer3_minwidth=0.254 midlayer3_maxwidth=0.254 midlayer4_minwidth=0.254 midlayer4_maxwidth=0.254 bottomlayer_minwidth=0.822 bottomlayer_prefwidth=0.966 impedancedriven=TRUE minimp=45.000000 maximp=55.000000 favimp=50.000000
Width "Schematic Width Constraint_2" [InNet('NetC29_2')] p3: maxlimit=1.133 minlimit=0.102 preferedwidth=0.254 toplayer_maxwidth=0.154 toplayer_prefwidth=0.126 midlayer1_minwidth=0.178 midlayer1_maxwidth=0.254 midlayer1_prefwidth=0.214 midlayer2_minwidth=0.628 midlayer2_maxwidth=0.869 midlayer2_prefwidth=0.74 midlayer3_minwidth=0.254 midlayer3_maxwidth=0.254 midlayer4_minwidth=0.254 midlayer4_maxwidth=0.254 bottomlayer_minwidth=0.822 bottomlayer_prefwidth=0.966 impedancedriven=TRUE minimp=45.000000 maximp=55.000000 favimp=50.000000
Width "Schematic Width Constraint_1" [InNet('NetC28_2')] p4: maxlimit=1.133 minlimit=0.102 preferedwidth=0.254 toplayer_maxwidth=0.154 toplayer_prefwidth=0.126 midlayer1_minwidth=0.178 midlayer1_maxwidth=0.254 midlayer1_prefwidth=0.214 midlayer2_minwidth=0.628 midlayer2_maxwidth=0.869 midlayer2_prefwidth=0.74 midlayer3_minwidth=0.254 midlayer3_maxwidth=0.254 midlayer4_minwidth=0.254 midlayer4_maxwidth=0.254 bottomlayer_minwidth=0.822 bottomlayer_prefwidth=0.966 impedancedriven=TRUE minimp=45.000000 maximp=55.000000 favimp=50.000000
Width "Schematic Width Constraint" [InNet('NetC27_2')] p5: maxlimit=1.133 minlimit=0.102 preferedwidth=0.254 toplayer_maxwidth=0.154 toplayer_prefwidth=0.126 midlayer1_minwidth=0.178 midlayer1_maxwidth=0.254 midlayer1_prefwidth=0.214 midlayer2_minwidth=0.628 midlayer2_maxwidth=0.869 midlayer2_prefwidth=0.74 midlayer3_minwidth=0.254 midlayer3_maxwidth=0.254 midlayer4_minwidth=0.254 midlayer4_maxwidth=0.254 bottomlayer_minwidth=0.822 bottomlayer_prefwidth=0.966 impedancedriven=TRUE minimp=45.000000 maximp=55.000000 favimp=50.000000
Width [All] p6: maxlimit=5.08 minlimit=0.152 preferedwidth=0.254
21 further rules are at their usual default settings.

## Classes and differential pairs
component class +3V3_PS: C140 C141 C142 C143 C144 R111 R133 R134 R135 U40
component class P26: C68 C69 C70 R97 R98 R99 TP28 U23
component class "Net Tie": J1 NT1 NT4 NT5 NT6
component class +1V8_PS: C83 C84 R112 U27
component class TestPoint: TP1 TP2 TP3 TP4 TP5 TP6 TP7 TP8 TP9 TP10 TP11 TP12 TP13 TP14 TP15 TP16 TP17 TP18 TP19 TP20 TP21 TP22 TP23 TP24 TP25 TP26 TP27 TP28 TP?
channel class "TXB0108 Voltage_Level_Translator": +1V8_VLT1 +1V8_VLT2
component class +1V8_VLT2: C55 C56 U18
component class +1V8_VLT1: C57 C58 U19
component class UART_MUX: R33 R34
net class A1_[0..7]: A1_0 A1_1 A1_2 A1_3 A1_4 A1_5 A1_6 A1_7
net class A2_[0..7]: A2_0 A2_1 A2_2 A2_3 A2_4 A2_5 A2_6 A2_7
net class B1_[0..7]: B1_0 B1_1 B1_2 B1_3 B1_4 B1_5 B1_6 B1_7
net class B2_[0..7]: B2_0 B2_1 B2_2 B2_3 B2_4 B2_5 B2_6 B2_7
component class P105: C67 U22
component class FiducialMark: FID1 FID2 FID3
component class USB-to-UART_Bridge: C129 C130 C131 C132 C133 R128 R129 R130 U37
component class P02: C146 D12 X7
component class P01: C145 D11 X6
component class U_ESP32-WROOM32D_Module: Q5 Q6 R51 R52 R53
component class P109: C14 C17 C18 C19 C20 C21 C22 C23 C24 C25 C26 C27 C28 C29 C30 C32 D4 D5 FB1 FB2 FB3 Q2 Q3 Q4 R33 R34 R35 R36 R37 R38 R43 R44 R47 R48 R49 R50 TP26 TP27 U6 U7 U8 X2 X3
component class P110: C43 C44 C45 C46 C47 C48 R64 R65 R66 R67 R68 R69 R70 R71 R72 R73 R74 R75 R76 U14
component class +4V2_PS: C49 C50 C51 C52 L2 R77 R78 R79 U15
component class USB_MUX: R87 R88
net class GPIO[0..21]: GPIO0 GPIO1 GPIO2 GPIO3 GPIO4 GPIO5 GPIO6 GPIO7 GPIO8 GPIO9 GPIO10 GPIO18 GPIO19 GPIO20 GPIO21
net class PA[0..15]: PA0 PA1 PA2 PA3 PA4 PA5 PA6 PA7 PA8 PA9 PA10 PA11 PA12 PA13 PA14 PA15
net class PB[0..15]: PB0 PB1 PB2 PB3 PB4 PB5 PB6 PB7 PB8 PB9 PB10 PB11 PB12 PB13 PB15
net class PC[0..15]: PC0 PC1 PC2 PC3 PC4 PC5 PC6 PC7 PC8 PC9 PC10 PC11 PC12 PC13 PC14
net class QSPI: PE10 PE11 PE12 PE13 PE14 PE15
channel class TS3USB3031_2-ch_2p3t_Multiplexer: UART_MUX USB_MUX
component class PCB_FEATURE: Logo
component class CODEC: C95 C96 C97 C98 C99 R114 R115 R116 U31
component class "U_DRV10975 3-ph Sensorless BLDC Motor Driver": C85 C86 C87 C88 C89 C90 D8 J1 R107 R108 R109 R110 U28
component class TCPP: C61 C63 C147 C148 Q7 R80 R81 U41
net class BG95_PWR: NetC19_1 NetC20_1 NetC20_2
component class I2C_SW: R5 R6 R7 R8
component class MCU: C105 U33
component class MIC1: C139 FB7 R132 U39
component class RTC_XTAL: C105 U33
component class STM32G473QETx: C106 C107 C108 C109 C110 C111 C112 C113 C114 C115 C116 C117 C118 C119 C120 FB5 R122 U34
net class PD[0..15]: PD0 PD1 PD2 PD7 PD8 PD9 PD10 PD12 PD13 PD14 PD15
net class PE[0..15]: PE0 PE1 PE2 PE3 PE4 PE5 PE6 PE7 PE8 PE9 PE10 PE11 PE12 PE13 PE14 PE15
net class PF[0..15]: PF0 PF1 PF2 PF3 PF4 PF6 PF7 PF14 PF15
net class PG[0..9]: PG0 PG1 PG2 PG3 PG4 PG5 PG6 PG7 PG8 PG9
component class STM32G473CETx: C64 C65 C66 NT2 NT3 Q8 R9 R10 R22 R23 R89 R90 R91 R92 R93 R94 R95 R96
component class P103: C71 C72 C73 C74 C75 C76 C77 C78 C79 C80 D7 FB4 L3 Q9 R100 R101 R102 R103 R104 R105 R106 U24 U25
component class "U_TPS22810 2": C121 C122 C123 R123 R124 U35
component class +3V3_AUDIO_PS: C124 C125 C126 C127 C128 R125 R126 R127 U36
component class P128: C93 C94 NT7 NT8 U30
channel class TPSM82822_2A_Buck_Module: +3V3_AUDIO_PS +3V3_PS
component class DISP_PS: C134 C135 C136 C137 C138 D9 D10 FB6 L4 R131 U38
component class FLASH: C104 R119 R120 R121 U32
channel class EC06-IDC_6-pin_Castellated_Board-Edge_Connector: P01 P02
differential pair CONN_D: +CONN_D_P -CONN_D_N
differential pair D1_USB_MUX: +D1_USB_MUX_P -D1_USB_MUX_N
differential pair D2_USB_MUX: +D2_USB_MUX_P -D2_USB_MUX_N
differential pair D3_USB_MUX: +D3_USB_MUX_P -D3_USB_MUX_N
differential pair D: +D_P -D_N

## Components (designator, comment, footprint, x,y, rotation, side; value= is the part's Value field where it differs from the comment)
C1 "CAP CER 1UF 16V X5R 0603" C0603 27.813,20.955 r0 top value=1uF (schematic designator C4)
C2 "CAP CER 0.047UF 50V X7R 0402" C0402 32.385,22.86 r90 top (schematic designator C5)
C3 "CAP CER 4.7UF 10V X5R 0603" C0603 31.115,23.368 r270 top (schematic designator C6)
C4 "CAP CER 10UF 25V X7R 1206" C1206 29.083,24.257 r270 top (schematic designator C7)
C5 "CAP CER 10uF X7R 10% 0805" C0805 34.29,14.986 r90 top (schematic designator C8)
C6 "CAP CER 10uF X7R 10% 0805" C0805 36.195,21.59 r180 top (schematic designator C9)
C7 "CAP CER 10uF X7R 10% 0805" C0805 36.195,17.78 r180 top (schematic designator C10)
C8 "CAP CER 10uF X7R 10% 0805" C0805 36.195,19.685 r180 top (schematic designator C11)
C9 "CAP ALUM 68 UF 20% 25 V SMD" WCAP-ASLI_6.3X5.5 5.08,24.13 r180 top (schematic designator C16)
C10 "CAP ALUM 68 UF 20% 25 V SMD" WCAP-ASLI_6.3X5.5 14.605,24.13 r0 top (schematic designator C17)
C11 "CAP ALUM 68 UF 20% 25 V SMD" WCAP-ASLI_6.3X5.5 5.08,33.655 r180 top (schematic designator C18)
C12 "CAP CER 10UF 16V X5R 0603" C0603 4.445,4.064 r180 top (schematic designator C34)
C13 "CAP CER 0.1UF 16V X7R 0402" C0402 4.953,2.794 r180 top (schematic designator C35)
C14 "CAP CER 0.1UF 50V X7R 0402" C0402 76.835,46.101 r180 bottom (schematic designator C36)
C15 "CAP CER 0.1UF 50V X7R 0402" C0402 5.715,51.562 r0 bottom (schematic designator C52)
C16 "CAP CER 0.1UF 50V X7R 0402" C0402 6.35,37.592 r90 bottom (schematic designator C53)
C17 "CAP CER 0.1UF 50V X7R 0402" C0402 60.833,32.004 r90 bottom (schematic designator C42)
C18 "CAP CER 2.2UF 6.3V X5R 0402" C0402 59.055,32.004 r90 bottom (schematic designator C43)
C19 "CAP CER 0.1UF 50V X7R 0402" C0402 84.201,34.036 r0 top (schematic designator C44)
C20 "CAP CER 0.1UF 50V X7R 0402" C0402 63.881,26.797 r90 top (schematic designator C45)
C21 "CAP CER 33PF 50V C0G/NPO 0402" C0402 84.201,32.766 r0 top (schematic designator C46)
C22 "CAP CER 33PF 50V C0G/NPO 0402" C0402 62.611,26.797 r90 top (schematic designator C47)
C23 "CAP CER 10PF 50V C0G/NP0 0402" C0402 84.201,31.496 r0 top (schematic designator C48)
C24 "CAP CER 10PF 50V C0G/NP0 0402" C0402 61.341,26.797 r90 top (schematic designator C49)
C25 "CAP ALUM 100 UF 20% 6.3 V SMD" WCAP-ASLI_5X5.5 20.955,12.7 r270 top (schematic designator C50)
C26 "CAP ALUM 100 UF 20% 6.3 V SMD" WCAP-ASLI_5X5.5 22.225,19.685 r0 top (schematic designator C51)
C27 "DNP*" C0402 84.074,44.45 r180 top (schematic designator C37)
C28 "DNP*" C0402 83.693,29.845 r270 top (schematic designator C38)
C29 "DNP*" C0402 84.074,48.26 r180 top (schematic designator C39)
C30 "DNP*" C0402 84.709,29.845 r270 top (schematic designator C40)
C31 "C 100pF 50V C0G, NP0 0402" C0402 84.709,26.797 r270 top (schematic designator C41)
C32 "CAP CER 10nF 25V X7R 10% 0402" C0402 63.5,47.752 r0 bottom (schematic designator C54)
C33 "CAP CER 0.1UF 50V X7R 0402" C0402 70.866,38.735 r180 bottom (schematic designator C55)
C34 "CAP CER 0.1UF 50V X7R 0402" C0402 43.18,38.735 r180 bottom (schematic designator C19)
C35 "CAP CER 0.1UF 50V X7R 0402" C0402 43.18,29.337 r180 bottom (schematic designator C20)
C36 "CAP CER 0.1UF 50V X7R 0402" C0402 35.56,9.017 r180 top (schematic designator C21)
C37 "CAP CER 1UF 6.3V X5R 0402" C0402 39.37,36.703 r0 top (schematic designator C22)
C38 "CAP CER 1UF 6.3V X5R 0402" C0402 39.37,27.178 r0 top (schematic designator C23)
C39 "CAP CER 1UF 6.3V X5R 0402" C0402 34.925,6.35 r180 top (schematic designator C24)
C40 "DNP*" C0402 39.37,37.719 r0 top (schematic designator C25)
C41 "DNP*" C0402 39.37,28.194 r0 top (schematic designator C26)
C42 "DNP*" C0402 34.925,3.302 r180 top (schematic designator C27)
C43 "CAP CER 10nF 25V X7R 10% 0402" C0402 32.385,5.08 r0 bottom (schematic designator C1)
C44 "CAP CER 1000PF 50V X7R 0402" C0402 32.385,8.128 r0 bottom (schematic designator C2)
C45 "CAP CER 1UF 6.3V X5R 0402" C0402 32.512,0.889 r0 bottom (schematic designator C3)
C46 "CAP CER 0.022UF 25V X7R 0402" C0402 34.544,2.921 r180 bottom (schematic designator C4)
C47 "CAP CER 22UF 25V X5R 0805" C0805 39.624,6.604 r0 bottom (schematic designator C5)
C48 "CAP CER 2.2UF 16V X5R 0603" C0603 39.497,8.382 r0 bottom (schematic designator C6)
C49 "CAP CER 10uF X7R 10% 0805" C0805 15.621,11.811 r0 top (schematic designator C1)
C50 "CAP CER 0.1UF 50V X7R 0402" C0402 11.176,15.875 r270 top (schematic designator C2)
C51 "CAP CER 22UF 10V X5R 0805" C0805 15.621,15.621 r180 top (schematic designator C3)
C52 "CAP CER 22UF 10V X5R 0805" C0805 15.621,13.716 r180 top (schematic designator C4)
C53 "CAP CER 0.1UF 50V X7R 0402" C0402 62.611,22.352 r270 bottom (schematic designator C1)
C54 "CAP CER 0.1UF 50V X7R 0402" C0402 37.465,20.701 r0 bottom (schematic designator C1)
C55 "CAP CER 0.1UF 50V X7R 0402" C0402 66.802,28.956 r270 bottom (schematic designator C28)
C56 "CAP CER 0.1UF 50V X7R 0402" C0402 66.929,23.622 r270 bottom (schematic designator C30)
C57 "CAP CER 0.1UF 50V X7R 0402" C0402 71.755,28.956 r270 bottom (schematic designator C28)
C58 "CAP CER 0.1UF 50V X7R 0402" C0402 71.882,23.622 r270 bottom (schematic designator C30)
C59 "CAP CER 2.2UF 6.3V X5R 0402" C0402 17.78,44.069 r180 top (schematic designator C1)
C60 "CAP CER 0.1UF 50V X7R 0402" C0402 17.78,45.085 r180 top (schematic designator C2)
C61 "CAP CER 220PF 50V X7R 0402" C0402 6.985,16.637 r180 bottom (schematic designator C1)
C62 "CAP CER 4.7UF 35V X7R 0805" C0805 4.445,30.607 r180 bottom (schematic designator C2)
C63 "CAP CER 220PF 50V X7R 0402" C0402 1.905,17.907 r0 bottom (schematic designator C3)
C64 "CAP CER 0.1UF 50V X7R 0402" C0402 14.605,35.814 r0 bottom (schematic designator C13)
C65 "CAP CER 0.1UF 50V X7R 0402" C0402 14.605,34.798 r0 bottom (schematic designator C14)
C66 "CAP CER 0.1UF 50V X7R 0402" C0402 14.605,36.83 r0 bottom (schematic designator C15)
C67 "CAP CER 0.1UF 50V X7R 0402" C0402 65.786,18.923 r90 top (schematic designator C1)
C68 "CAP CER 0.1UF 16V X7R 0402" C0402 56.896,12.7 r90 top (schematic designator C1)
C69 "CAP CER 0.1UF 16V X7R 0402" C0402 58.928,12.7 r90 top (schematic designator C2)
C70 "CAP 11MF 3.3V SURFACE MNT" CAPCP3225X100N 58.42,10.16 r0 top (schematic designator C3)
C71 "CAP CER 0.1UF 50V X7R 0402" C0402 34.925,29.591 r180 top (schematic designator C1)
C72 "CAP CER 0.1UF 50V X7R 0402" C0402 38.354,31.623 r270 top (schematic designator C2)
C73 "CAP CER 22UF 25V X5R 0805" C0805 16.891,33.655 r90 top (schematic designator C3)
C74 "CAP CER 0.1UF 50V X7R 0402" C0402 32.893,29.591 r0 top (schematic designator C4)
C75 "CAP CER 1800PF 50V X7R 0402" C0402 36.83,32.131 r180 top (schematic designator C5)
C76 "CAP CER 1UF 16V X5R 0402" C0402 36.576,41.148 r180 top (schematic designator C6)
C77 "CAP CER 22UF 25V X5R 0805" CAPC2012X14N 30.226,33.655 r90 top (schematic designator C7)
C78 "CAP CER 22UF 25V X5R 0805" C0805 21.844,41.275 r90 top (schematic designator C8)
C79 "CAP CER 22UF 25V X5R 0805" C0805 19.812,41.275 r90 top (schematic designator C9)
C80 "CAP CER 22UF 25V X5R 0805" C0805 17.78,41.275 r90 top (schematic designator C10)
C81 "CAP CER 1UF 16V X5R 0402" C0402 39.37,33.401 r0 bottom (schematic designator C1)
C82 "CAP CER 0.1UF 50V X7R 0402" C0402 39.37,32.385 r0 bottom (schematic designator C2)
C83 "CAP CER 2.2UF 6.3V X5R 0402" C0402 38.608,46.355 r90 bottom (schematic designator C1)
C84 "CAP CER 2.2UF 6.3V X5R 0402" C0402 41.402,46.355 r90 bottom (schematic designator C2)
C85 "CAP CER 0.1UF 50V X7R 0402" C0402 31.623,50.165 r90 top (schematic designator C1)
C86 "CAP CER 1UF 6.3V X5R 0402" C0402 28.448,44.704 r0 top (schematic designator C2)
C87 "CAP CER 1UF 6.3V X5R 0402" C0402 28.448,45.72 r0 top (schematic designator C3)
C88 "CAP CER 0.1UF 50V X7R 0402" C0402 32.893,50.165 r270 top (schematic designator C4)
C89 "CAP CER 22UF 25V X5R 0805" C0805 34.417,50.8 r90 top (schematic designator C5)
C90 "CAP CER 10uF X7R 10% 0805" C0805 26.416,45.974 r270 top (schematic designator C6)
C91 "CGA2B3X7R1H104K050BB" C0402 29.845,38.227 r270 top (schematic designator C1)
C92 "CGA2B3X7R1H104K050BB" C0402 28.575,43.815 r0 top (schematic designator C2)
C93 "CAP CER 0.1UF 50V X7R 0402" C0402 9.017,37.592 r270 bottom (schematic designator C1)
C94 "CAP CER 0.1UF 50V X7R 0402" C0402 10.668,37.592 r90 bottom (schematic designator C2)
C95 "CAP CER 10nF 25V X7R 10% 0402" C0402 26.543,7.239 r180 bottom (schematic designator C28)
C96 "CAP CER 10PF 50V C0G/NP0 0402" C0402 25.527,9.271 r270 bottom (schematic designator C29)
C97 "C 100pF 50V C0G, NP0 0402" CAP_0402 22.479,9.271 r270 bottom (schematic designator C30)
C98 "CAP CER 10nF 25V X7R 10% 0402" C0402 21.463,9.271 r270 bottom (schematic designator C31)
C99 "CAP CER 0.1UF 50V X7R 0402" C0402 23.495,9.271 r270 bottom (schematic designator C32)
C100 "CAP CER 1UF 16V X5R 0402" C0402 84.709,11.938 r180 top (schematic designator C1)
C101 "CAP CER 10UF 16V X5R 0603" C0603 82.55,8.128 r0 bottom (schematic designator C2)
C102 "CAP CER 10UF 16V X5R 0603" C0603 82.55,9.779 r0 bottom (schematic designator C3)
C103 "CAP CER 0.1UF 16V X7R 0402" C0402 84.709,8.89 r180 top (schematic designator C4)
C104 "CAP CER 0.1UF 50V X7R 0402" C0402 21.59,51.435 r180 bottom (schematic designator C1)
C105 "CAP CER 0.1UF 50V X7R 0402" C0402 12.954,30.734 r270 bottom (schematic designator C12)
C106 "CAP CER 0.1UF 50V X7R 0402" C0402 14.605,28.702 r0 bottom (schematic designator C2)
C107 "CAP CER 10uF X7R 10% 0805" C0805 33.02,41.402 r0 bottom (schematic designator C7)
C108 "CAP CER 0.1UF 50V X7R 0402" C0402 14.605,32.004 r0 bottom (schematic designator C3)
C109 "CAP CER 0.1UF 50V X7R 0402" C0402 33.655,33.782 r0 bottom (schematic designator C8)
C110 "CAP CER 0.1UF 50V X7R 0402" C0402 14.605,38.989 r0 bottom (schematic designator C4)
C111 "CAP CER 0.1UF 50V X7R 0402" C0402 33.655,27.305 r0 bottom (schematic designator C9)
C112 "CAP CER 0.1UF 50V X7R 0402" C0402 23.495,42.672 r270 bottom (schematic designator C5)
C113 "CAP CER 0.1UF 50V X7R 0402" C0402 24.765,23.622 r270 bottom (schematic designator C10)
C114 "CAP CER 0.1UF 50V X7R 0402" C0402 30.353,42.672 r90 bottom (schematic designator C6)
C115 "CAP CER 0.1UF 50V X7R 0402" C0402 17.907,23.622 r270 bottom (schematic designator C11)
C116 "CAP CER 0.1UF 50V X7R 0402" C0402 29.21,24.384 r0 bottom (schematic designator C12)
C117 "CAP CER 1UF 16V X5R 0402" C0402 29.21,23.368 r0 bottom (schematic designator C13)
C118 "CAP CER 0.1UF 50V X7R 0402" C0402 31.242,24.384 r180 bottom (schematic designator C14)
C119 "CAP CER 1UF 16V X5R 0402" C0402 31.242,23.368 r180 bottom (schematic designator C15)
C120 "CAP CER 0.1UF 50V X7R 0402" C0402 5.461,32.512 r180 bottom (schematic designator C1)
C121 "CAP CER 2.2UF 35V X5R 0603" C0603 44.45,48.649 r270 bottom (schematic designator C1)
C122 "CAP CER 0.1UF 16V X7R 0402" C0402 39.116,52.078 r180 bottom (schematic designator C2)
C123 "CAP CER 2.2UF 35V X5R 0603" C0603 37.338,49.792 r90 bottom (schematic designator C3)
C124 "CAP CER 10UF 16V X5R 0603" CAPC1608X08N_0603 26.035,13.97 r0 bottom (schematic designator C1)
C125 "CAP CER 10UF 16V X5R 0603" CAPC1608X08N_0603 26.035,15.24 r0 bottom (schematic designator C2)
C126 "CAP CER 100PF 50V C0G/NPO 0402" C0402 21.209,11.811 r180 bottom (schematic designator C3)
C127 "CAP CER 10UF 16V X5R 0603" CAPC1608X08N_0603 26.035,12.7 r0 bottom (schematic designator C4)
C128 "CAP CER 10UF 16V X5R 0603" CAPC1608X08N_0603 26.035,11.43 r0 bottom (schematic designator C5)
C129 "CAP CER 1UF 16V X5R 0402" C0402 62.23,11.684 r0 top (schematic designator C1)
C130 "CAP CER 0.1UF 50V X7R 0402" C0402 65.151,15.24 r270 top (schematic designator C2)
C131 "CAP CER 1UF 16V X5R 0402" C0402 62.23,15.24 r270 top (schematic designator C3)
C132 "CAP CER 1UF 16V X5R 0402" C0402 63.246,15.24 r270 top (schematic designator C4)
C133 "CAP CER 0.1UF 50V X7R 0402" C0402 64.262,15.24 r270 top (schematic designator C5)
C134 "CAP CER 10UF 16V X5R 0603" C0603 4.445,6.604 r180 top (schematic designator C1)
C135 "CAP CER 0.1UF 50V X7R 0402" C0402 1.27,17.145 r270 top (schematic designator C2)
C136 "CAP CER 10UF 16V X7R 0805" C0805 3.175,13.97 r0 top (schematic designator C3)
C137 "CAP CER 10UF 16V X5R 0603" C0603 8.255,11.176 r90 top (schematic designator C4)
C138 "CAP CER 10UF 16V X5R 0603" C0603 7.62,17.018 r90 top (schematic designator C5)
C139 "CAP CER 0.1UF 50V X7R 0402" C0402 61.595,1.397 r180 bottom (schematic designator C33)
C140 "CAP CER 10UF 16V X5R 0603" CAPC1608X08N_0603 22.86,51.435 r90 top (schematic designator C1)
C141 "CAP CER 10UF 16V X5R 0603" CAPC1608X08N_0603 24.13,51.435 r90 top (schematic designator C2)
C142 "CAP CER 100PF 50V C0G/NPO 0402" C0402 21.082,46.609 r270 top (schematic designator C3)
C143 "CAP CER 10UF 16V X5R 0603" CAPC1608X08N_0603 21.59,51.435 r90 top (schematic designator C4)
C144 "CAP CER 10UF 16V X5R 0603" CAPC1608X08N_0603 20.32,51.435 r90 top (schematic designator C5)
C145 "CAP CER 0.1UF 50V X7R 0402" C0402 78.232,51.435 r90 top (schematic designator C1)
C146 "CAP CER 0.1UF 50V X7R 0402" C0402 65.786,51.435 r90 top (schematic designator C1)
C147 "CAP CER 1UF 16V X5R 0402" C0402 13.97,23.241 r180 bottom (schematic designator C1)
C148 "CAP CER 0.1UF 50V X7R 0402" C0402 9.398,20.447 r90 bottom (schematic designator C2)
D1 "\"CHG\"" LED_0603 1.27,31.242 r90 bottom (schematic designator D2)
D2 "ESDA7P120-1U1M" ST_QFN_1610 37.465,15.24 r270 top (schematic designator D3)
D3 "NSR0140P2T5G" SODFL100X40-2N 16.51,9.525 r0 top (schematic designator D4)
D4 "MM3Z5V1C" SOD-323F 73.66,45.466 r180 bottom (schematic designator D5)
D5 "ESDA7P120-1U1M" ST_QFN_1610 15.621,18.415 r270 top (schematic designator D6)
D6 "ESDA25P35-1U1M" ST_QFN_1610 9.525,26.416 r90 bottom (schematic designator D1)
D7 "PMEG4050EP,115" SOD-128 26.035,41.275 r0 top (schematic designator D1)
D8 "Zener Diode 6.2V 2.5W ±5% Surface Mount SOD-123FL" SOD-123FL 27.559,48.895 r180 top (schematic designator D1)
D9 "STPS120MF" SODFL375X95-2N 7.366,14.097 r180 top (schematic designator D1)
D10 "MMSZ5226B-7-F" SOD-123 10.16,7.62 r0 top (schematic designator D2)
D11 "SMF05CT1G" SOT363_SOP65P210X265-6N 74.422,50.8 r0 top (schematic designator D1)
D12 "SMF05CT1G" SOT363_SOP65P210X265-6N 61.976,50.8 r0 top (schematic designator D1)
ESP32_MOD "ESP32-C3-MINI-1-H4" MODULE_ESP32-C3-MINI-1 76.835,11.176 r180 top
FB1 "Not Fitted in BG95-M3_Global Variant" L0603 17.145,18.415 r270 top (schematic designator FB2)
FB2 "MPZ1608S300ATAH0" L0603 83.82,36.322 r90 top (schematic designator FB3)
FB3 "MPZ1608S300ATAH0" L0603 59.69,26.289 r270 top (schematic designator FB4)
FB4 "FERRITE BEAD 1 KOHM 0402 1LN" L0402 34.544,41.148 r0 top (schematic designator FB1)
FB5 "FERRITE BEAD 1 KOHM 0402 1LN" L0402 31.242,22.352 r0 bottom (schematic designator FB1)
FB6 "FERRITE BEAD 470 OHM 0603 1LN" L0603 1.016,10.16 r270 top (schematic designator FB1)
FB7 "FERRITE BEAD 1 KOHM 0402 1LN" L_0402 59.69,1.397 r0 bottom (schematic designator FB1)
FID1 "N/A" FIDUCIAL 9.6,30.5 r0 top
FID2 "N/A" FIDUCIAL 81.915,19.939 r90 top
FID3 "N/A" FIDUCIAL 18.034,51.562 r90 top
G1 "Logo_ESD" Logo_ESD 82.55,42.672 r90 bottom
Ground&PowerPlanes_1 "Number & Stacking Stripe" SIGNAL-1 120.047,1.844 r0 top
Ground&PowerPlanes_4 "Number & Stacking Stripe" SIGNAL-4 120.047,1.844 r0 top
Ground&PowerPlanes_5 "Number & Stacking Stripe" SIGNAL-5 120.015,1.778 r0 top
Ground&PowerPlanes_6 "Number & Stacking Stripe" SIGNAL-6 120.047,1.844 r0 bottom
J1 "Net Tie" "Net Tie 6x30mil" 33.274,40.259 r90 top net-tie
L1 "FIXED IND 1UH 5A 24 MOHM SMD" IND_IHLP-1212B00 34.925,24.384 r0 top
L2 "FIXED IND 1UH 2.4A 54 MOHM MAX" IND_WE_LQSH_3012 12.192,12.7 r90 top (schematic designator L1)
L3 "FIXED IND COUIPLED 2.2UH 3.2A 22 MOHM SMD" IND_MSD1048H 23.495,33.655 r180 top (schematic designator L1)
L4 "FIXED IND COUIPLED 6.8UH 1.2A 160 mOHM SMD" IND_LPD5030 4.445,10.16 r180 top (schematic designator L1)
Logo "Logo ACME_CPU" LOGO_ACME_CPU 83.185,31.242 r90 bottom
NT1 "Net Tie" "Net Tie 8x30mil" 29.464,15.113 r270 top net-tie (schematic designator NT2)
NT2 "Net Tie" "NET TIE 6X30MIL" 32.639,28.194 r0 bottom net-tie (schematic designator NT3)
NT3 "Net Tie" "NET TIE 6X30MIL" 32.639,28.448 r0 bottom net-tie (schematic designator NT4)
NT4 "Net Tie" "Net Tie 6x30mil" 38.1,29.464 r0 bottom net-tie (schematic designator NT1)
NT5 "Net Tie" "NET TIE 6X30MIL" 60.706,5.715 r270 bottom net-tie
NT6 "Net Tie" "Net Tie 6x30mil" 22.225,1.854 r90 bottom net-tie
NT7 "Net Tie" "Net Tie 6x30mil" 10.033,33.274 r270 bottom net-tie
NT8 "Net Tie" "Net Tie 6x30mil" 8.382,33.274 r270 bottom net-tie
P10 "USB" MOLEX_2012670005 3.97,24.13 r90 bottom
P16 "DC Motor" CONN_JST_S4B-ZR-SM4A-TF(LF)(SN) 42.545,47.625 r90 top
P17 "BLDC Motor" CONN_JST_S5B-ZR-SM4A-TF(LF)(SN) 39.624,47.625 r90 top
P18 "BATT" CONN_JST_S2B-ZR-SM4A-TF(LF)(SN) 42.545,17.145 r90 top
P19 "THERMISTOR NTC 10KOHM 3380K 0603" R0603 31.496,13.335 r180 top
P20 "S201" CONN_0545500571 42.545,36.83 r90 top
P25 "Stepper Motor" CONN_JST_SM4B-NSHSS-TB(LF)(SN) 41.91,7.62 r90 top
P28 "S202" CONN_0545500571 42.545,27.305 r90 top
Q1 "DMN32D2LV-7" SON_400UV-7_DIO 43.815,42.545 r180 bottom (schematic designator Q3)
Q2 "DTC143ZET1G" SOT-416FL_ONS 64.77,45.847 r90 bottom (schematic designator Q6)
Q3 "DTC143ZET1G" SOT-416FL_ONS 62.23,45.847 r90 bottom (schematic designator Q7)
Q4 "DMN32D2LV-7" SON_400UV-7_DIO 70.866,36.83 r0 bottom (schematic designator Q8)
Q5 "BC847CW,115" SOT-323 72.771,8.89 r270 bottom (schematic designator Q4)
Q6 "BC847CW,115" SOT-323 72.771,14.097 r90 bottom (schematic designator Q5)
Q7 "DMN32D2LV-7" SON_400UV-7_DIO 4.445,17.272 r0 bottom (schematic designator Q1)
Q8 "EM6M2T2R" SON_400UV-7_DIO 12.7,31.877 r0 top (schematic designator Q2)
Q9 "BC847CW,115" SOT-323 32.385,36.195 r270 top (schematic designator Q1)
R1 "RC0402FR-071KL" R0402 1.27,33.909 r90 bottom value=22k (schematic designator R12)
R2 "RES SMD 10K OHM 1% 1/16W 0402" R0402 30.353,15.113 r270 top (schematic designator R13)
R3 "RES SMD 31.6K OHM 1% 1/16W 0402" R0402 32.004,14.605 r0 top (schematic designator R14)
R4 "RES SMD 5.36K OHM 1% 1/16W 0402" R0402 32.004,15.621 r0 top (schematic designator R15)
R5 "RES SMD 4.75K OHM 1% 1/16W 0402" R0402 43.18,34.925 r180 bottom (schematic designator R16)
R6 "RES SMD 4.75K OHM 1% 1/16W 0402" R0402 44.831,35.814 r270 bottom (schematic designator R17)
R7 "RES SMD 4.75K OHM 1% 1/16W 0402" R0402 43.18,25.527 r180 bottom (schematic designator R18)
R8 "RES SMD 4.75K OHM 1% 1/16W 0402" R0402 44.831,26.416 r270 bottom (schematic designator R19)
R9 "RES SMD 2.7K OHM 1% 1/16W 0402" R0402 43.18,32.385 r0 bottom (schematic designator R20)
R10 "RES SMD 2.7K OHM 1% 1/16W 0402" R0402 43.18,31.369 r0 bottom (schematic designator R21)
R11 "RES SMD 100K OHM 1% 1/16W 0402" R0402 39.37,38.862 r180 bottom (schematic designator R22)
R12 "RES SMD 100K OHM 1% 1/16W 0402" R0402 39.37,37.846 r180 bottom (schematic designator R23)
R13 "RES SMD 100K OHM 1% 1/16W 0402" R0402 39.37,35.814 r180 bottom (schematic designator R24)
R14 "RES SMD 100K OHM 1% 1/16W 0402" R0402 60.96,21.971 r0 top (schematic designator R25)
R15 "RES SMD 100K OHM 1% 1/16W 0402" R0402 60.96,22.987 r0 top (schematic designator R26)
R16 "RES SMD 100K OHM 1% 1/16W 0402" R0402 43.18,30.353 r180 bottom (schematic designator R27)
R17 "RES SMD 100K OHM 1% 1/16W 0402" R0402 66.802,51.435 r270 top (schematic designator R28)
R18 "RES SMD 100K OHM 1% 1/16W 0402" R0402 13.97,33.782 r0 top (schematic designator R29)
R19 "RES SMD 100K OHM 1% 1/16W 0402" R0402 39.37,35.687 r180 top (schematic designator R30)
R20 "RES SMD 100K OHM 1% 1/16W 0402" R0402 39.37,26.162 r180 top (schematic designator R31)
R21 "RES SMD 100K OHM 1% 1/16W 0402" R0402 34.925,5.334 r0 top (schematic designator R32)
R22 "RES SMD 0 OHM JUMPER 1/16W 0402" R0402 35.56,30.353 r180 bottom (schematic designator R33)
R23 "RES SMD 0 OHM JUMPER 1/16W 0402" R0402 35.56,29.21 r180 bottom (schematic designator R34)
R24 "RES SMD 10K OHM 1% 1/16W 0402" R0402 41.275,43.053 r180 bottom (schematic designator R43)
R25 "RES SMD 10K OHM 1% 1/16W 0402" R0402 41.275,42.037 r180 bottom (schematic designator R44)
R26 "RES SMD 0 OHM JUMPER 1/16W 0402" R0402 38.608,43.053 r180 bottom (schematic designator R45)
R27 "RES SMD 0 OHM JUMPER 1/16W 0402" R0402 38.608,42.037 r180 bottom (schematic designator R46)
R28 "DNP*" R0402 41.275,41.021 r180 bottom (schematic designator R47)
R29 "RES SMD 10K OHM 1% 1/16W 0402" R0402 38.608,44.069 r180 bottom (schematic designator R48)
R30 "RES SMD 10K OHM 1% 1/16W 0402" R0402 38.608,41.021 r180 bottom (schematic designator R49)
R31 "DNP*" R0402 41.275,44.069 r0 bottom (schematic designator R50)
R32 "RES SMD 1K OHM 1% 1/16W 0402" R0402 39.37,36.83 r0 bottom (schematic designator R62)
R33 "RES SMD 10K OHM 1% 1/16W 0402" R0402 63.627,22.352 r90 bottom (schematic designator R70)
R34 "RES SMD 10K OHM 1% 1/16W 0402" R0402 64.643,22.352 r90 bottom (schematic designator R71)
R35 "RES SMD 0 OHM JUMPER 1/16W 0402" R0402 73.533,46.863 r0 bottom (schematic designator R72)
R36 "DNP*" R0402 73.533,47.879 r0 bottom (schematic designator R73)
R37 "DNP*" R0402 73.533,48.895 r0 bottom (schematic designator R74)
R38 "RES SMD 10K OHM 1% 1/16W 0402" R0402 76.835,45.085 r180 bottom (schematic designator R75)
R39 "RES SMD 15K OHM 1% 1/16W 0402" R0402 6.35,35.433 r90 bottom (schematic designator R78)
R40 "RES SMD 0 OHM JUMPER 1/16W 0402" R0402 5.334,35.433 r90 bottom (schematic designator R79)
R41 "RES SMD 0 OHM JUMPER 1/16W 0402" R0402 4.318,35.433 r90 bottom (schematic designator R80)
R42 "RES SMD 0 OHM JUMPER 1/16W 0402" R0402 3.302,35.433 r90 bottom (schematic designator R81)
R43 "RES SMD 0 OHM JUMPER 1/16W 0402" R0402 83.566,46.355 r90 top (schematic designator R76)
R44 "RES SMD 0 OHM JUMPER 1/16W 0402" R0402 84.201,28.321 r0 top (schematic designator R77)
R45 "RES SMD 5.1K OHM 1% 1/16W 0402" R0402 59.055,34.29 r90 bottom (schematic designator R82)
R46 "RES SMD 100K OHM 1% 1/16W 0402" R0402 59.055,36.322 r270 bottom (schematic designator R83)
R47 "RES SMD 10K OHM 1% 1/16W 0402" R0402 68.326,36.322 r180 bottom (schematic designator R84)
R48 "RES SMD 100K OHM 1% 1/16W 0402" R0402 68.326,37.338 r0 bottom (schematic designator R85)
R49 "RES SMD 10K OHM 1% 1/16W 0402" R0402 73.406,37.338 r0 bottom (schematic designator R86)
R50 "RES SMD 100K OHM 1% 1/16W 0402" R0402 73.406,36.322 r180 bottom (schematic designator R87)
R51 "RES SMD 0 OHM JUMPER 1/16W 0402" R0402 84.709,14.986 r0 top (schematic designator R63)
R52 "RES SMD 10K OHM 1% 1/16W 0402" R0402 72.136,11.557 r270 bottom (schematic designator R64)
R53 "RES SMD 10K OHM 1% 1/16W 0402" R0402 73.406,11.557 r90 bottom (schematic designator R65)
R54 "RES SMD 100K OHM 1% 1/16W 0402" R0402 84.709,9.906 r180 top (schematic designator R66)
R55 "RES SMD 100K OHM 1% 1/16W 0402" R0402 84.709,10.922 r180 top (schematic designator R67)
R56 "RES SMD 100K OHM 1% 1/16W 0402" R0402 73.66,18.034 r270 top (schematic designator R68)
R57 "RES SMD 100K OHM 1% 1/16W 0402" R0402 78.486,18.034 r270 top (schematic designator R69)
R58 "RES SMD 0 OHM JUMPER 1/16W 0402" R0402 44.831,37.846 r270 bottom (schematic designator R51)
R59 "RES SMD 0 OHM JUMPER 1/16W 0402" R0402 44.831,28.448 r270 bottom (schematic designator R52)
R60 "RES SMD 0 OHM JUMPER 1/16W 0402" R0402 35.56,12.573 r0 top (schematic designator R53)
R61 "DNP*" R0402 39.37,38.735 r180 top (schematic designator R54)
R62 "DNP*" R0402 39.37,29.21 r180 top (schematic designator R55)
R63 "DNP*" R0402 34.925,4.318 r0 top (schematic designator R56)
R64 "RES SMD 68.1K OHM 1% 1/16W 0402" R0402 35.052,1.397 r90 bottom (schematic designator R1)
R65 "RES SMD 18.2K OHM 1% 1/16W 0402" R0402 32.385,7.112 r180 bottom (schematic designator R2)
R66 "RES SMD 18.2K OHM 1% 1/16W 0402" R0402 32.385,6.096 r180 bottom (schematic designator R3)
R67 "RES SMD 360KOHM 1% 1/16W 0402" R0402 34.036,1.397 r90 bottom (schematic designator R4)
R68 "RES SMD 10K OHM 1% 1/16W 0402" R0402 32.512,1.905 r0 bottom (schematic designator R5)
R69 "RES SMD 1K OHM 1% 1/16W 0402" R0402 34.036,4.445 r90 bottom (schematic designator R6)
R70 "RES SMD 47K OHM 1% 1/16W 0402" R0402 35.052,4.445 r90 bottom (schematic designator R7)
R71 "RES SMD 10K OHM 1% 1/16W 0402" R0402 34.163,11.176 r270 bottom (schematic designator R8)
R72 "RES SMD 10K OHM 1% 1/16W 0402" R0402 35.179,11.176 r270 bottom (schematic designator R9)
R73 "RES SMD 10K OHM 1% 1/16W 0402" R0402 32.385,10.16 r0 bottom (schematic designator R10)
R74 "RES SMD 10K OHM 1% 1/16W 0402" R0402 32.385,9.144 r0 bottom (schematic designator R11)
R75 "RES SMD 2.2 OHM 5% 1W 2512" R2512 39.751,3.302 r180 bottom (schematic designator R12)
R76 "RES SMD 2.2 OHM 5% 1W 2512" R2512 39.878,11.938 r180 bottom (schematic designator R13)
R77 "RES SMD 100K OHM 1% 1/16W 0402" R0402 12.319,18.415 r270 top (schematic designator R1)
R78 "RES SMD 100K OHM 1% 1/16W 0402" R0402 13.335,18.415 r270 top (schematic designator R2)
R79 "RES SMD 536K OHM 1% 1/16W 0402" R0402 14.351,18.415 r90 top (schematic designator R3)
R80 "RES SMD 100K OHM 1% 1/16W 0402" R0402 1.905,16.637 r0 bottom (schematic designator R3)
R81 "RES SMD 100K OHM 1% 1/16W 0402" R0402 6.985,17.907 r180 bottom (schematic designator R4)
R82 "DNP*" R0402 28.194,16.51 r180 top (schematic designator R5)
R83 "RES SMD 10K OHM 1% 1/16W 0402" R0402 26.162,16.51 r180 top (schematic designator R6)
R84 "RES SMD 0 OHM JUMPER 1/16W 0402" R0402 27.178,18.542 r0 top (schematic designator R7)
R85 "DNP*" R0402 28.194,17.526 r180 top (schematic designator R8)
R86 "RES SMD 10K OHM 1% 1/16W 0402" R0402 26.162,17.526 r180 top (schematic designator R9)
R87 "RES SMD 10K OHM 1% 1/16W 0402" R0402 37.465,21.717 r180 bottom (schematic designator R10)
R88 "RES SMD 10K OHM 1% 1/16W 0402" R0402 37.465,22.733 r180 bottom (schematic designator R11)
R89 "RES SMD 390K OHM 1% 1/16W 0402" R0402 11.938,35.814 r0 top (schematic designator R35)
R90 "RES SMD 390K OHM 1% 1/16W 0402" R0402 11.938,36.83 r0 top (schematic designator R36)
R91 "RES SMD 100K OHM 1% 1/16W 0402" R0402 14.478,31.877 r270 top (schematic designator R37)
R92 "RES SMD 75K OHM 1% 1/16W 0402" R0402 13.97,35.814 r180 top (schematic designator R38)
R93 "RES SMD 75K OHM 1% 1/16W 0402" R0402 13.97,36.83 r180 top (schematic designator R39)
R94 "RES SMD 100K OHM 1% 1/16W 0402" R0402 11.938,33.782 r180 top (schematic designator R40)
R95 "RES SMD 27K OHM 1% 1/16W 0402" R0402 11.938,34.798 r0 top (schematic designator R41)
R96 "RES SMD 75K OHM 1% 1/16W 0402" R0402 13.97,34.798 r180 top (schematic designator R42)
R97 "RES SMD 10K OHM 1% 1/16W 0402" R0402 59.309,17.018 r180 top (schematic designator R1)
R98 "RES SMD 402 OHM 1% 1/16W 0402" R0402 57.912,12.7 r270 top (schematic designator R2)
R99 "RES SMD 10K OHM 1% 1/16W 0402" R0402 59.944,12.7 r90 top (schematic designator R3)
R100 "RES SMD 54.9K OHM 1% 1/16W 0402" R0402 34.671,35.179 r180 top (schematic designator R1)
R101 "RES SMD 1.2K OHM 1% 1/16W 0402" R0402 36.83,31.115 r180 top (schematic designator R2)
R102 "DNP*" R0402 34.671,36.195 r0 top (schematic designator R3)
R103 "RES SMD 10K OHM 1% 1/16W 0402" R0402 36.83,33.147 r0 top (schematic designator R4)
R104 "RES SMD 2.7K OHM 1% 1/16W 0402" R0402 36.83,36.195 r0 top (schematic designator R5)
R105 "RES SMD 44.2K OHM 1% 1/16W 0402" R0402 36.83,34.163 r180 top (schematic designator R6)
R106 "RES SMD 11K OHM 1% 1/16W 0402" R0402 36.83,35.179 r180 top (schematic designator R7)
R107 "DNP*" R0402 30.226,41.402 r90 top (schematic designator R2)
R108 "DNP*" R0402 31.242,41.402 r90 top (schematic designator R3)
R109 "RES SMD 4.75K OHM 1% 1/16W 0402" R0402 32.258,41.402 r90 top (schematic designator R4)
R110 "RES SMD 39 OHM 1% 1/4W 1206" R1206 28.702,51.435 r180 top (schematic designator R5)
R111 "RES SMD 0 OHM JUMPER 1/16W 0402" R0402 24.13,48.895 r90 top (schematic designator R1)
R112 "RES SMD 0 OHM JUMPER 1/16W 0402" R0402 37.592,47.625 r90 bottom (schematic designator R2)
R113 "RES SMD 100 OHM 1% 1/16W 0402" 0402R 26.543,5.207 r180 bottom (schematic designator R57)
R114 "RES SMD 63.4K OHM 1% 1/16W 0402" R_0402 24.511,9.271 r90 bottom (schematic designator R58)
R115 "RES SMD 100K OHM 1% 1/16W 0402" 0402R 26.543,6.223 r0 bottom (schematic designator R59)
R116 "RES SMD 100K OHM 1% 1/16W 0402" 0402R 21.59,1.905 r270 bottom (schematic designator R60)
R117 "RES SMD 100 OHM 1% 1/16W 0402" R0402 84.709,13.97 r0 top (schematic designator R1)
R118 "RES SMD 10K OHM 1% 1/16W 0402" R0402 84.709,12.954 r180 top (schematic designator R2)
R119 "RES SMD 10K OHM 1% 1/16W 0402" R0402 21.59,47.625 r0 bottom (schematic designator R1)
R120 "RES SMD 10K OHM 1% 1/16W 0402" R0402 21.59,50.165 r0 bottom (schematic designator R2)
R121 "RES SMD 10K OHM 1% 1/16W 0402" R0402 33.02,48.895 r180 bottom (schematic designator R3)
R122 "RES SMD 100 OHM 1% 1/16W 0402" R0402 5.461,33.528 r0 bottom (schematic designator R1)
R123 "RES SMD 10K OHM 1% 1/16W 0402" R0402 44.45,51.189 r90 bottom (schematic designator R1)
R124 "RES SMD 100 OHM 1% 1/2W 0805" R0805 39.116,49.792 r270 bottom (schematic designator R2)